# Altium PCB C2Sv1.PcbDoc (part 1 of 2)
Units mm, origin at the board's own origin, x right, y up, seen from the top; angles counter-clockwise.
Board outline 52 x 53 mm, 4 copper layers (Signal 1, GND, Power, Signal 2), stack 1.57 mm thick; 81 components, 85 nets, 351 pads, 170 vias.
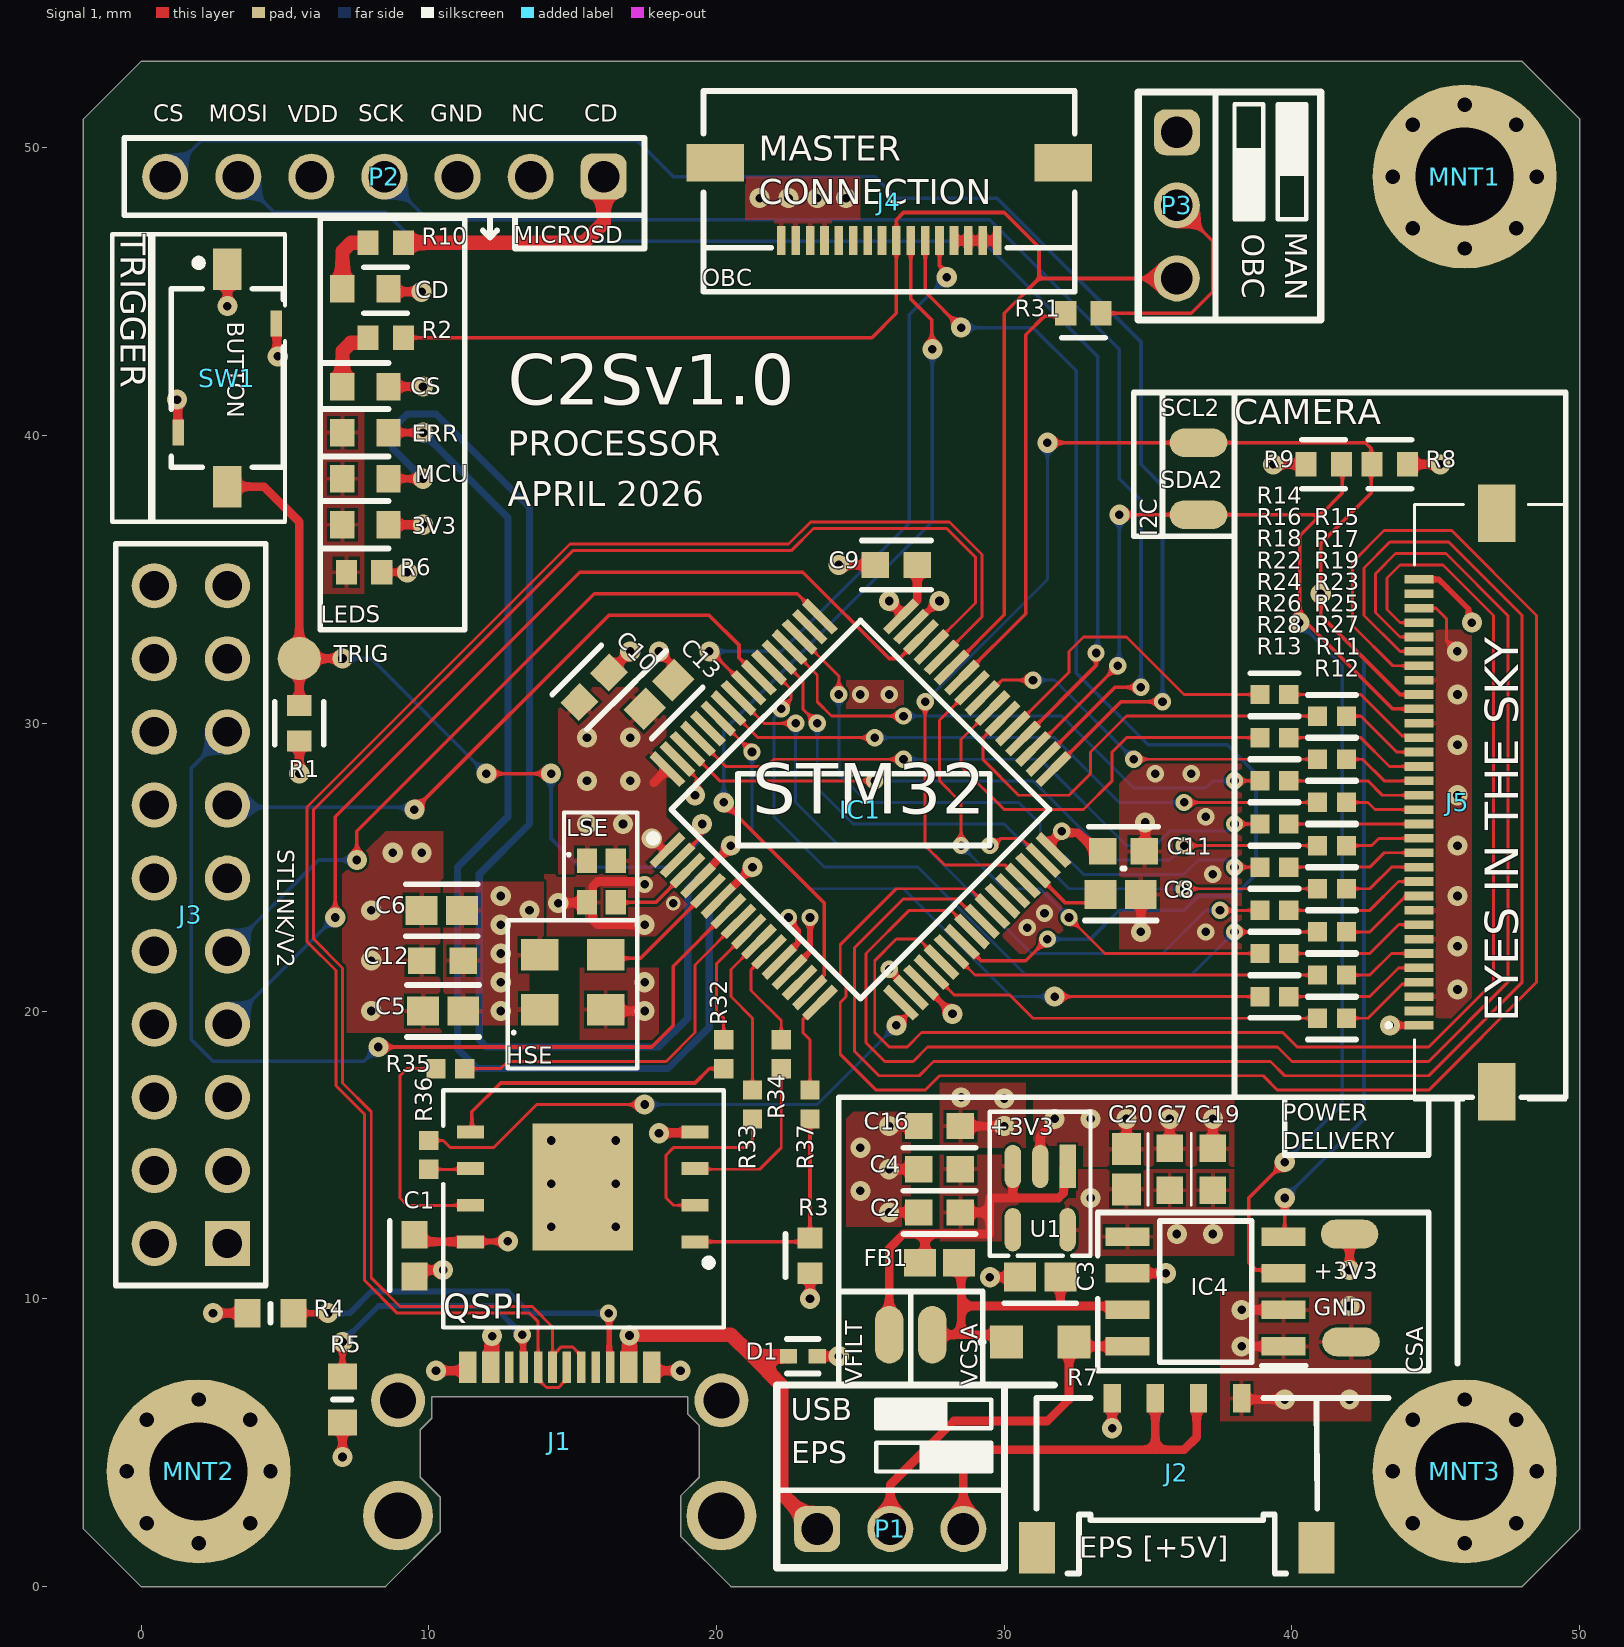
[diagram p0: Signal 1 view]
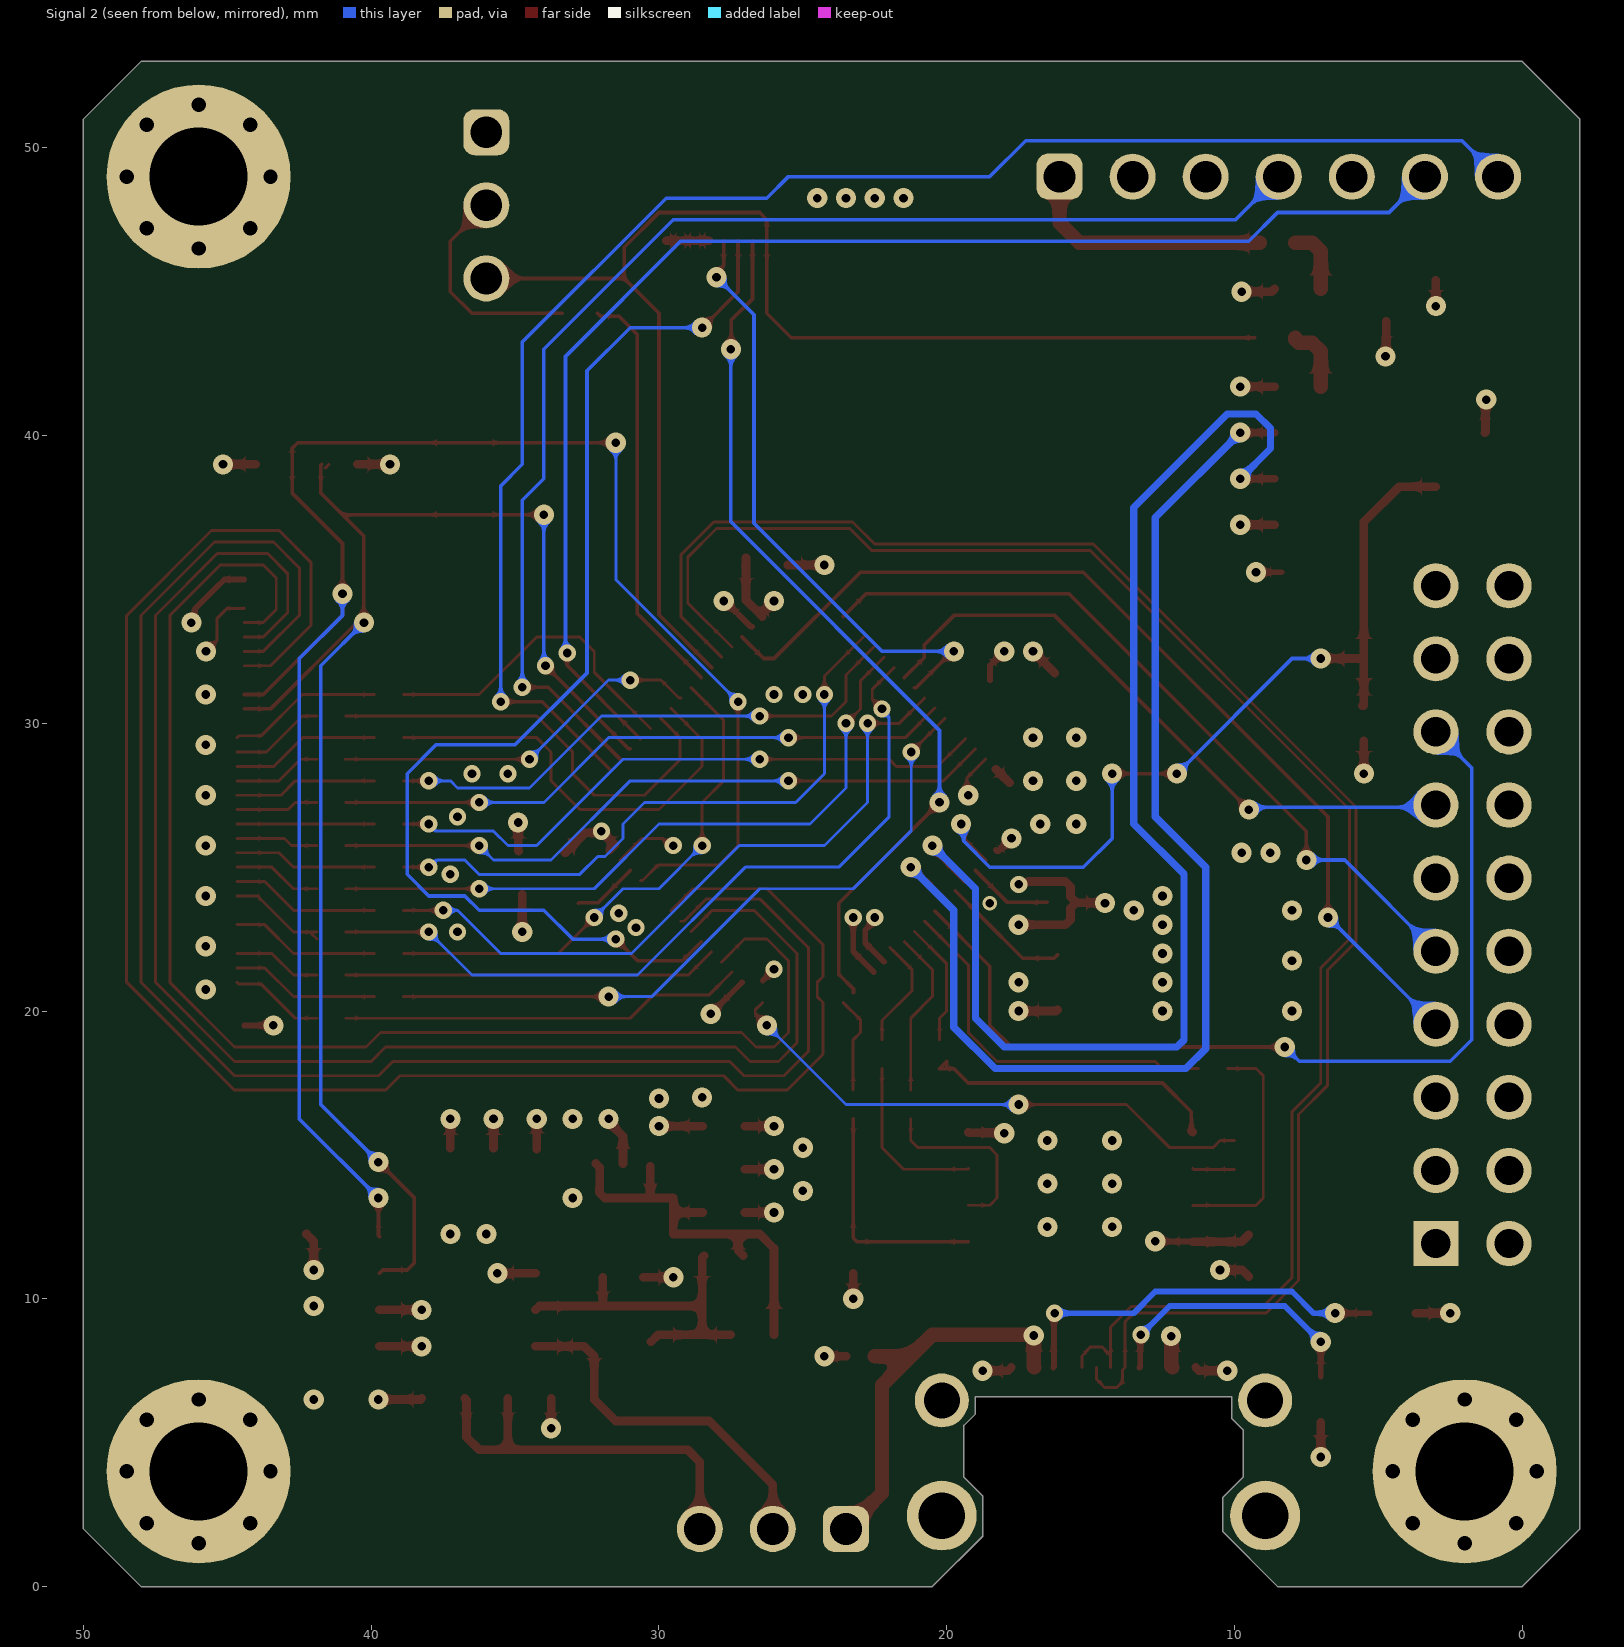
[diagram p1: Signal 2 view, seen from below]
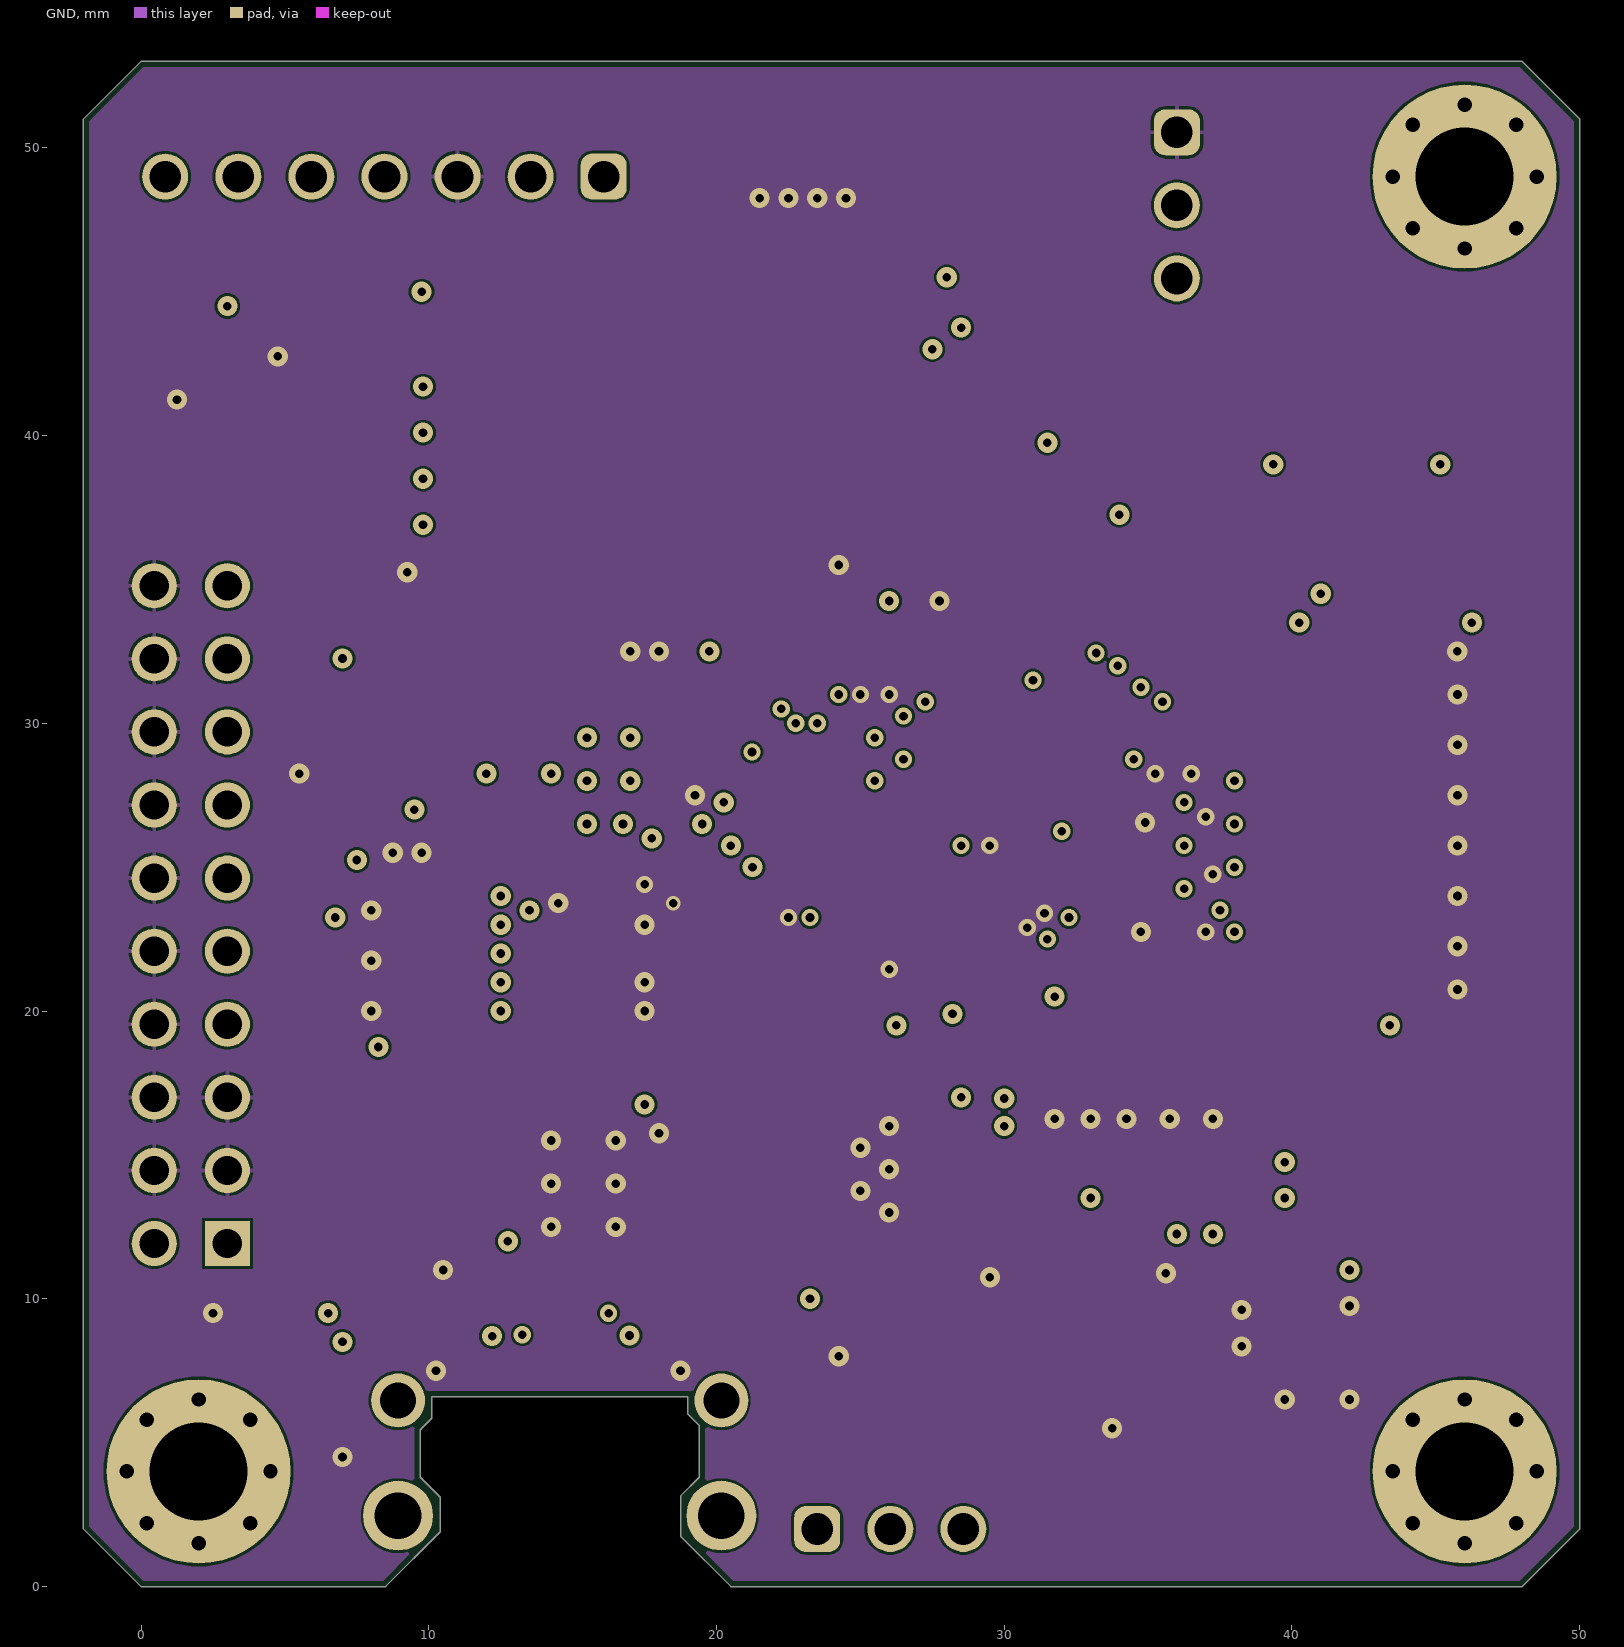
[diagram p2: GND]
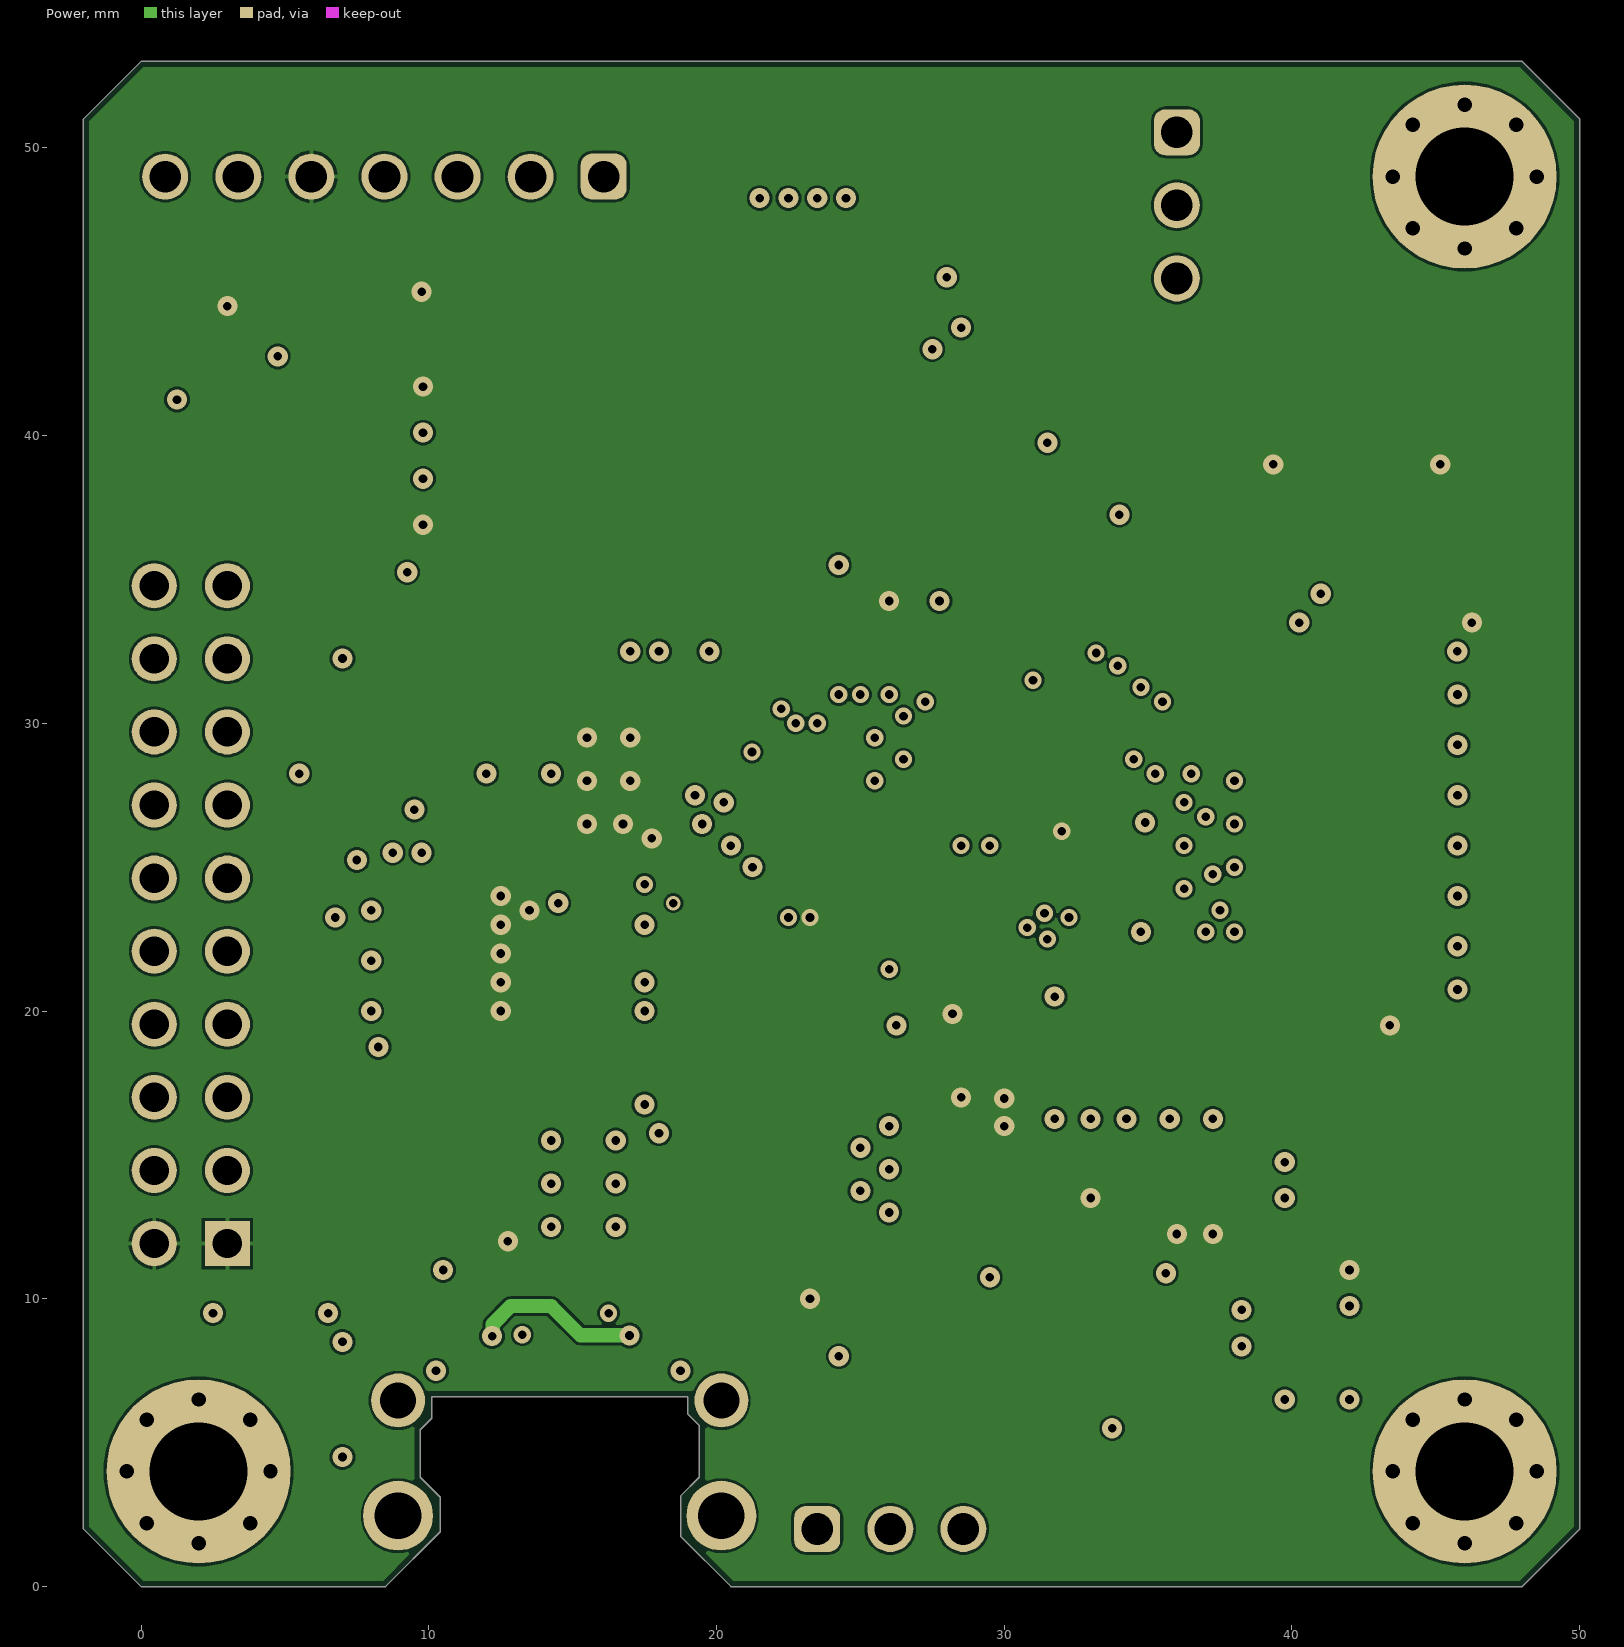
[diagram p3: Power]
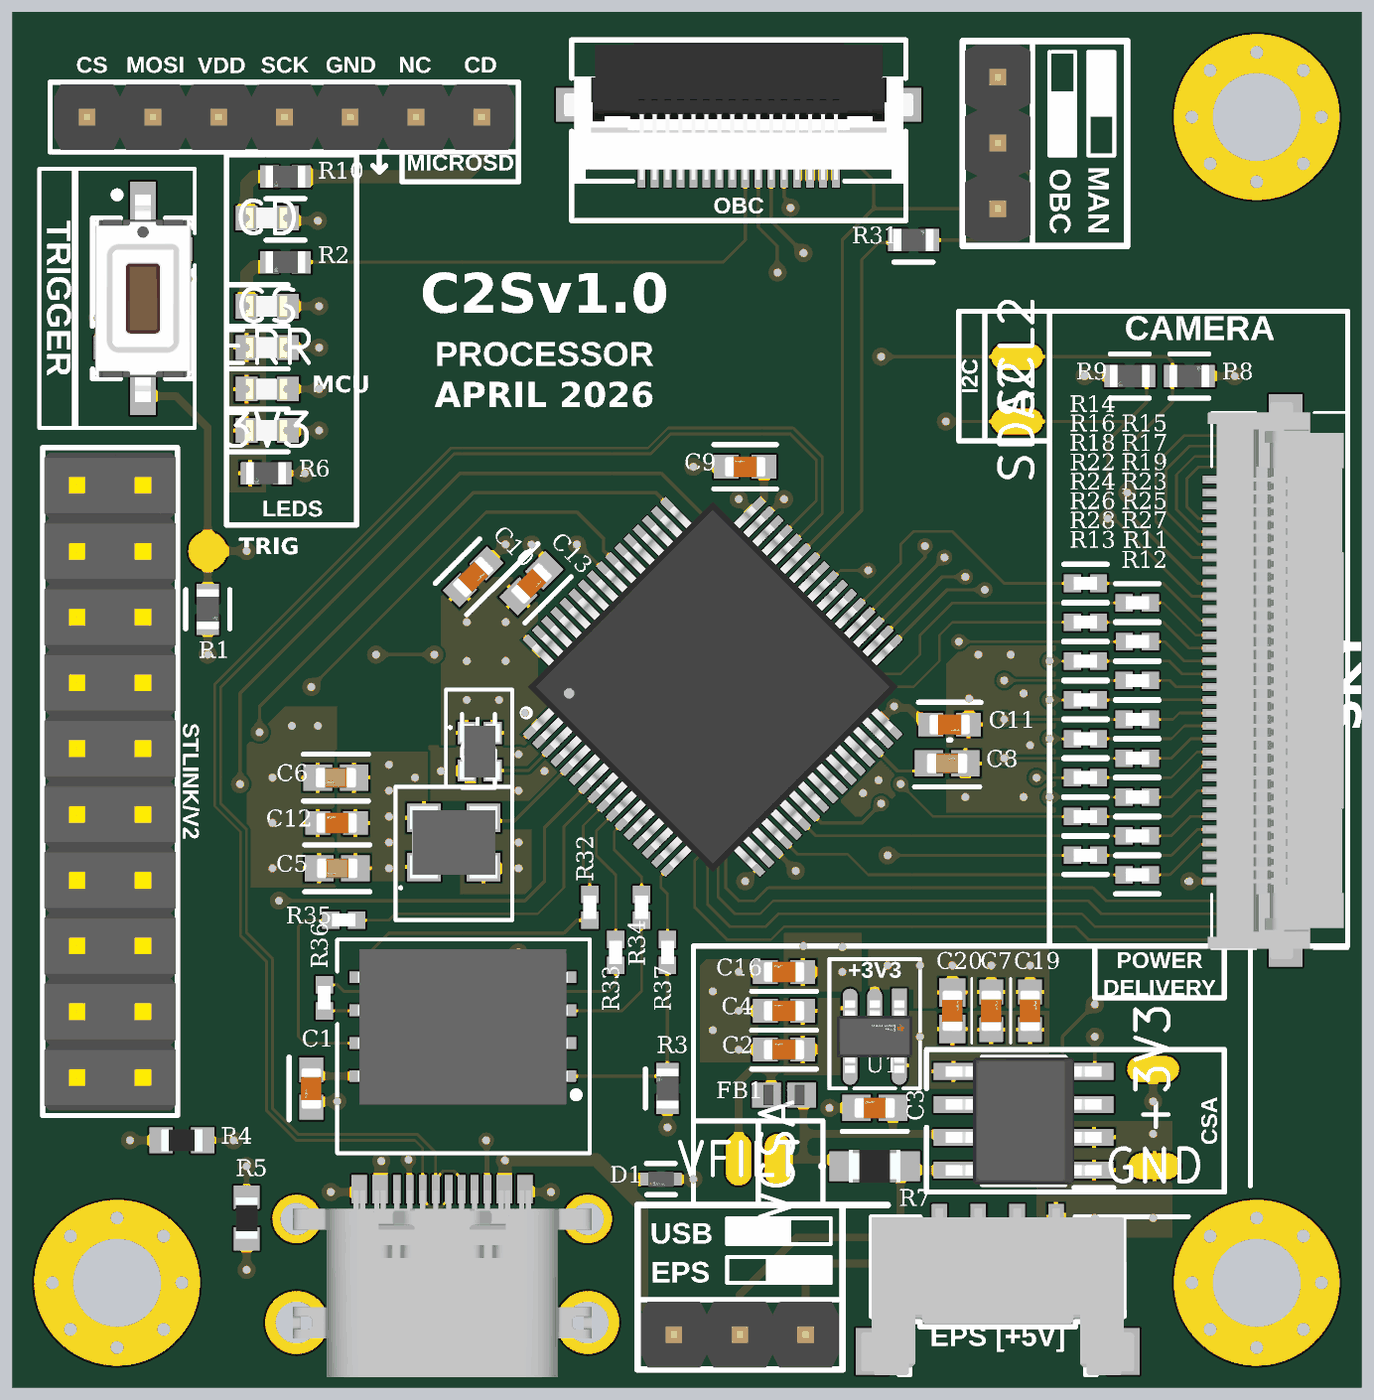
[diagram p4: 3D render of the assembled board from above, using the file's embedded part models]

## Layer stack, top to bottom
Top Solder: solder mask 0.0127, Solder Resist, Dk 3.8
Signal 1: signal copper 0.035
Dielectric 1: prepreg 0.1, 2313, Dk 4.05
GND: signal copper 0.0175
Core: core 1.265, FR-4, Dk 4.5
Power: signal copper 0.0175
Dielectric 2: prepreg 0.1, 2313, Dk 4.05
Signal 2: signal copper 0.035
Bottom Solder: solder mask 0.0127, Solder Resist, Dk 3.8

## Board outline
-2,2 0,0 8.5,0 10.4,1.9 10.4,3.1 9.7,3.8 9.7,5.45 10.1,5.85 10.1,6.6 19,6.6 19,6 19.4,5.6 19.4,3.8 18.75,3.15 18.75,1.75 20.5,0 48,0 50,2 50,51 48,53 0,53 -2,51

## Design rules (kind name [scope] priority, off if disabled: settings)
BoardOutlineClearance [All] p1: gap=0.2 ignorepadtopadclearanceinfootprint=FALSE
Clearance [All] p1: gap=0.089 ignorepadtopadclearanceinfootprint=FALSE except(0.1: SMDPad-Hole THPad-Hole Fill-Hole Poly-Hole Region-Hole; 0.2: Arc-Hole Track-Hole Via-Hole; 0.25: Text-Hole)
ComponentClearance [All] p1: gap=0.102 collisioncheckmode=3 verticalgap=0.102 showdistances=TRUE
DiffPairsRouting [All] p1: maxlimit=0.127 minlimit=0.127 mostfreqgap=0.127 toplayer_minwidth=0.102 toplayer_maxwidth=0.102 toplayer_prefwidth=0.102 midlayer1_minwidth=0.107 midlayer1_maxwidth=0.107 midlayer1_prefwidth=0.107 midlayer2_minwidth=0.107 midlayer2_maxwidth=0.107 midlayer2_prefwidth=0.107 bottomlayer_minwidth=0.149 bottomlayer_maxwidth=0.149 bottomlayer_prefwidth=0.149 impedanceprofiledriven=TRUE impedanceprofileid={D8ADF94D-BC98-40DC-B78C-3431A2F245A2} impedanceprofilevalue=90.000000 maxuncoupledlength=12.7
Height [All] p1: minheight=0 maxheight=1816.048 prefheight=12.7
HoleSize [All] p1: absolutevalues=TRUE maxlimit=6.3 minlimit=0.2 maxpercent=80.000 minpercent=20.000
HoleToHoleClearance [All] p1: gap=0.25 allowstackedmicrovias=FALSE
MinimumAnnularRing [All] p1: minimumring=0.074
MinimumSolderMaskSliver [All] p1: minsoldermaskwidth=0
PlaneClearance [All] p1: clearance=0.102
PlaneConnect PlaneConnectPowerPads [InPadClass('PowerPads')] p1: planeconnectstyle=Direct reliefexpansion=0.508 reliefentries=4 reliefconductorwidth=0.254 reliefairgap=0.254
PlaneConnect [All] p2: pad.planeconnectstyle=Relief pad.reliefexpansion=0.3 pad.reliefentries=4 pad.reliefconductorwidth=0.102 pad.reliefairgap=0.102 via.planeconnectstyle=Direct via.reliefexpansion=0.3 via.reliefentries=4 via.reliefconductorwidth=0.127 via.reliefairgap=0.127
PolygonConnect PolygonConnectPowerPads [All vs (InPadClass('PowerPads'))] p1: connectstyle=Direct reliefconductorwidth=0.254 reliefentries=4 polygonreliefangle="90 Angle" airgapwidth=0.254
PolygonConnect [All] p2: thpad.connectstyle=Relief thpad.reliefconductorwidth=0.152 thpad.reliefentries=4 thpad.polygonreliefangle="90 Angle" thpad.airgapwidth=0.102 smdpad.connectstyle=Relief smdpad.reliefconductorwidth=0.152 smdpad.reliefentries=4 smdpad.polygonreliefangle="90 Angle" smdpad.airgapwidth=0.102 via.connectstyle=Direct via.reliefconductorwidth=0.127 via.reliefentries=4 via.polygonreliefangle="90 Angle" via.airgapwidth=0.127
RoutingVias [All] p1: holewidth=0.2 width=0.45 viastyle="Through Hole" minholewidth=0.2 minwidth=0.45 maxholewidth=6.3 maxwidth=6.55
SignalTopValue [All] p1: minimum=3.300
SilkToSilkClearance [All] p1: silktosilkclearance=0
SilkToSolderMaskClearance [IsPad] p1: minsilkscreentomaskgap=0.102 clearancetoexposedcopper=TRUE
SolderMaskExpansion Via_SME [IsVia] p1: expansion=0.102 istentingtop=TRUE
SolderMaskExpansion [All] p2: expansion=0.08 istentingtop=FALSE
SupplyNets "Schematic Supply Nets_4" [InNet('VSEL')] p1: voltage=0.000
SupplyNets "Schematic Supply Nets_3" [InNet('VCSA')] p2: voltage=0.000
SupplyNets "Schematic Supply Nets_1" [InNet('VFILT')] p3: voltage=0.000
SupplyNets "Schematic Supply Nets_2" [InNet('+VCAP')] p4: voltage=0.000
SupplyNets "Schematic Supply Nets_7" [InNet('+VUSB')] p5: voltage=0.000
SupplyNets "Schematic Supply Nets_6" [InNet('+VEPS')] p6: voltage=0.000
SupplyNets "Schematic Supply Nets_5" [InNet('+3V3')] p7: voltage=0.000
SupplyNets "Schematic Supply Nets" [InNet('GND')] p8: voltage=0.000
Width [All] p1: maxlimit=1816.048 minlimit=0.102 preferedwidth=0.102
20 further rules are at their usual default settings.

## Classes and differential pairs
component class U_Power: C2 C3 C4 C7 C19 C20 D1 FB1 IC4 J1 J2 P1 R4 R5 R7 U1
component class U_Memory: C1 QSPI R3
component class U_MCU: 3V3 +3V3 C5 C6 C8 C9 C10 C11 C12 C13 C16 CS ERR GND HSE IC1 LSE LSE. MCU R1 R2 R6 SCL2 SDA2 SW1 TRIG VCSA VFILT
component class U_Connectors: CD J3 J4 J5 P2 P3 R10
component class TopLevel: MNT1 MNT2 MNT3 R8 R9 R11 R12 R13 R14 R15 R16 R17 R18 R19 R22 R23 R24 R25 R26 R27 R28 R31 R32 R33 R34 R35 R36 R37
differential pair USB_D: +USB_D_P -USB_D_N

## Components (designator, comment, footprint, x,y, rotation, side; value= is the part's Value field where it differs from the comment)
3V3 "HSMG-C190" LEDC1608X90N 7.8,36.9 r0 top
+3V3 "TP" TP06R#1 42,12.25 r90 top
C1 "GCM188L81H104MA57D" FP-GCM188-0_1-IPC_B 9.5,11.5 r270 top value=100nF
C2 "GCM188L81H104MA57D" FP-GCM188-0_1-IPC_B 27.75,13 r180 top value=100nF
C3 "GCM188D70J106ME36D" FP-GCM188-0_2-IPC_B 31.25,10.75 r180 top value=10µF
C4 "GCM188R71C105KA64J" FP-GCM188-0_1-IPC_B 27.75,14.5 r180 top value=1µF
C5 "GRT188C81E475KE13J" FP-GRT188-0_2-IPC_B 10.5,20 r180 top value=4.7µF
C6 "GRT188C81E475KE13J" FP-GRT188-0_2-IPC_B 10.451,23.5 r180 top value=4.7µF
C7 "GCM188R71C105KA64J" FP-GCM188-0_1-IPC_B 35.75,14.5 r90 top value=1µF
C8 "GRT188C81E475KE13J" FP-GRT188-0_2-IPC_B 34.046,24.051 r0 top value=4.7µF
C9 "GCM188L81H104MA57D" FP-GCM188-0_1-IPC_B 26.25,35.5 r180 top value=100nF
C10 "GCM188L81H104MA57D" FP-GCM188-0_1-IPC_B 15.75,31.25 r45 top value=100nF
C11 "GCM188L81H104MA57D" FP-GCM188-0_1-IPC_B 34.146,25.551 r0 top value=100nF
C12 "GCM188L81H104MA57D" FP-GCM188-0_1-IPC_B 10.477,21.75 r180 top value=100nF
C13 "GCM188D70J106ME36D" FP-GCM188-0_2-IPC_B 18,31 r45 top value=10µF
C16 "GCM188R71C105KA64J" FP-GCM188-0_1-IPC_B 27.75,16 r180 top value=1µF
C19 "GCM188L81H104MA57D" FP-GCM188-0_1-IPC_B 37.25,14.5 r90 top value=100nF
C20 "" FP-GCM188-0_2-IPC_B 34.25,14.5 r90 top value=10µF
CD "HSMG-C190" LEDC1608X90N 7.8,45.1 r0 top
CS "HSMG-C190" LEDC1608X90N 7.8,41.7 r0 top
D1 "TPD1E10B06DPYR" FP-DPY0002A-MFG 23,8 r0 top
ERR "HSMG-C190" LEDC1608X90N 7.8,40.1 r0 top
FB1 "120R" FP-BLM18-0_15-t0_6-d1_2-IPC_B 27.75,11.25 r180 top
GND "TP" TP06R#2 42.051,8.5 r0 top
HSE "ECS-TXO-3225MV-240-TR" ECSTXO3225MV240TR 15,21 r0 top
IC1 "STM32U575RIT3" QFP50P1200X1200X160-64N 25,27 r45 top locked
IC4 "INA219BIDR" SOIC127P600X175-8N 37,10.25 r180 top locked
J1 "USB C Connector" UJ20CHGMSMT2P16TR 14.551,5.265 r0 top locked
J2 "504050-0491" 5040500491 36,3.5 r180 top locked
J3 "TSW-110-08-G-D" FP-TSW-110-08-G-D-MFG 1.73,23.35 r90 top locked
J4 "505110-1692" FP-505110-1692-MFG 26.002,49.251 r180 top
J5 "505110-3291" 5051103291 46.887,27.25 r90 top locked
LSE "ECS-327TXO-2012-33-TR" ECS327TXO201233TR 16,24.5 r270 top
MCU "HSMG-C190" LEDC1608X90N 7.8,38.5 r0 top
MNT1 "M3 Mount" M3_Mount-Footprint-1 46,49 r0 top
MNT2 "M3 Mount" M3_Mount-Footprint-1 2,4 r0 top
MNT3 "M3 Mount" M3_Mount-Footprint-1 46,4 r0 top
P1 "61300311121" 61300311121 26.04,2 r0 top
P2 "61300711121" 61300711121 8.46,49 r180 top
P3 "61300311121" 61300311121 36,48 r270 top
QSPI "AT25SF2561C-MWUB-T" SON127P800X600X80-9N-D 15.35,13.885 r180 top
R1 "CRCW060310K0FKED" FP-CRCW0603-e3-IPC_C 5.5,30 r270 top value=10kΩ
R2 "CRCW0603470RFKEC" FP-CRCW0603-e3-IPC_C 8.5,43.4 r180 top value=470Ω
R3 "CRCW060310K0FKED" FP-CRCW0603-e3-IPC_C 23.25,11.5 r90 top value=10kΩ
R4 "5.1k" RESC1608X55N 4.5,9.5 r180 top
R5 "5.1k" RESC1608X55N 7,6.5 r270 top
R6 "CRCW0603470RFKEC" FP-CRCW0603-e3-IPC_C 7.75,35.25 r180 top value=470Ω
R7 "ERJ-6DQF1R6V" ERJ6_B_BW_R_LW_CW_D 31.25,8.5 r0 top
R8 "CRCW060310K0FKED" FP-CRCW0603-e3-IPC_C 43.4,39 r0 top value=10kΩ
R9 "CRCW060310K0FKED" FP-CRCW0603-e3-IPC_C 41.1,39 r180 top value=10kΩ
R10 "CRCW0603470RFKEC" FP-CRCW0603-e3-IPC_C 8.5,46.7 r180 top value=470Ω
R11 "CRCW040222R0JNED" FP-CRCW0402-e3-IPC_A 41.387,21.25 r0 top value=22Ω
R12 "CRCW040222R0JNED" FP-CRCW0402-e3-IPC_A 41.387,19.75 r0 top value=22Ω
R13 "CRCW040222R0JNED" FP-CRCW0402-e3-IPC_A 39.387,20.5 r0 top value=22Ω
R14 "CRCW040222R0JNED" FP-CRCW0402-e3-IPC_A 39.387,31 r0 top value=22Ω
R15 "CRCW040222R0JNED" FP-CRCW0402-e3-IPC_A 41.387,30.25 r0 top value=22Ω
R16 "CRCW040222R0JNED" FP-CRCW0402-e3-IPC_A 39.387,29.5 r0 top value=22Ω
R17 "CRCW040222R0JNED" FP-CRCW0402-e3-IPC_A 41.39,28.75 r0 top value=22Ω
R18 "CRCW040222R0JNED" FP-CRCW0402-e3-IPC_A 39.387,28 r0 top value=22Ω
R19 "CRCW040222R0JNED" FP-CRCW0402-e3-IPC_A 41.387,27.25 r0 top value=22Ω
R22 "CRCW040222R0JNED" FP-CRCW0402-e3-IPC_A 39.387,26.5 r0 top value=22Ω
R23 "CRCW040222R0JNED" FP-CRCW0402-e3-IPC_A 41.387,25.75 r0 top value=22Ω
R24 "CRCW040222R0JNED" FP-CRCW0402-e3-IPC_A 39.387,25 r0 top value=22Ω
R25 "CRCW040222R0JNED" FP-CRCW0402-e3-IPC_A 41.387,24.25 r0 top value=22Ω
R26 "CRCW040222R0JNED" FP-CRCW0402-e3-IPC_A 39.387,23.5 r0 top value=22Ω
R27 "CRCW040222R0JNED" FP-CRCW0402-e3-IPC_A 41.387,22.75 r0 top value=22Ω
R28 "CRCW040222R0JNED" FP-CRCW0402-e3-IPC_A 39.387,22 r0 top value=22Ω
R31 "CRCW060310K0FKED" FP-CRCW0603-e3-IPC_C 32.75,44.25 r0 top value=10kΩ
R32 "CRCW040222R0JNED" FP-CRCW0402-e3-IPC_A 20.25,18.5 r90 top value=22Ω
R33 "CRCW040222R0JNED" FP-CRCW0402-e3-IPC_A 21.25,16.75 r90 top value=22Ω
R34 "CRCW040222R0JNED" FP-CRCW0402-e3-IPC_A 22.25,18.5 r90 top value=22Ω
R35 "CRCW040222R0JNED" FP-CRCW0402-e3-IPC_A 10.75,18 r0 top value=22Ω
R36 "CRCW040222R0JNED" FP-CRCW0402-e3-IPC_A 10,15 r90 top value=22Ω
R37 "CRCW040222R0JNED" FP-CRCW0402-e3-IPC_A 23.25,16.75 r90 top value=22Ω
SCL2 "TP" TP06R#1 36.75,39.75 r90 top
SDA2 "TP" TP06R#1 36.75,37.25 r90 top
SW1 "PTS636" FP-PTS636_SKG25_SMTR_LFS-MFG 3,42 r270 top locked
TRIG "TP" TP06R#3 5.5,32.25 r0 top
U1 "TPS7A2033PDBVR" FP-DBV0005A-IPC_B 31.25,13.5 r270 top
VCSA "TP" TP06R#2 27.5,8.75 r270 top
VFILT "TP" TP06R#1 26,8.75 r180 top

## Footprints (in the part's own frame and the unit in brackets; to place one, negate y for a bottom-side part, rotate by r counter-clockwise, add the part's x,y. Pads: shape width x height; smd on the part's side, far side on the other; paste and mask are expansions set on the pad)
5040500491 [mm]
  rect 0.6x1 smd: 1(2.25,-3.04) 2(0.75,-3.04) 3(-0.75,-3.04) 4(-2.25,-3.04)
  rect 1.25x1.8 smd: MP1(4.855,2.15) MP2(-4.855,2.15)
  silkscreen extent -4.87,-3.05 4.87,3.05, body extent -5.28,-3.37 5.28,3.07, height 2
5051103291 [mm]
  rect 0.3x1 smd mask+0.04: 1(-7.75,2.475) 2(-7.25,2.475) 3(-6.75,2.475) 4(-6.25,2.475) 5(-5.75,2.475) 6(-5.25,2.475) 7(-4.75,2.475) 8(-4.25,2.475) 9(-3.75,2.475) 10(-3.25,2.475) 11(-2.75,2.475) 12(-2.25,2.475) 13(-1.75,2.475) 14(-1.25,2.475) 15(-0.75,2.475) 16(-0.25,2.475) 17(0.25,2.475) 18(0.75,2.475) 19(1.25,2.475) 20(1.75,2.475) 21(2.25,2.475) 22(2.75,2.475) 23(3.25,2.475) 24(3.75,2.475) 25(4.25,2.475) 26(4.75,2.475) 27(5.25,2.475) 28(5.75,2.475) 29(6.25,2.475) 30(6.75,2.475) 31(7.25,2.475) 32(7.75,2.475)
  rect 2x1.3 smd: MP1(-10.05,-0.225) MP2(10.05,-0.225)
  silkscreen extent -10.35,-2.63 10.35,3.57, body extent -10.75,-2.47 10.75,2.83, height 1.9
61300311121 [mm] "Pin Header, pitch 2.54 mm, THT, Vertical, single row, 3p"
  rrect50% 1.6x1.6 hole 1.1: 1(-2.54,0)
  round 1.6 hole 1.1: 2(0,0) 3(2.54,0)
  silkscreen extent -3.96,-1.35 3.96,1.35, body extent -3.81,-1.27 3.81,1.27, height 8.57
61300711121 [mm] "Pin Header, pitch 2.54 mm, THT, Vertical, single row, 7p"
  rrect50% 1.6x1.6 hole 1.1: 1(-7.62,0)
  round 1.6 hole 1.1: 2(-5.08,0) 3(-2.54,0) 4(0,0) 5(2.54,0) 6(5.08,0) 7(7.62,0)
  silkscreen extent -9.04,-1.35 9.04,1.35, body extent -8.89,-1.27 8.89,1.27, height 8.57
ECS327TXO201233TR [mm]
  rect 0.85x0.7 smd: 1(-0.725,-0.5) 2(0.725,-0.5) 3(0.725,0.5) 4(-0.725,0.5)
  silkscreen extent -0.98,-1.18 -0.88,-1.08, body extent -1.08,-0.78 1.08,0.78, height 1.3
ECSTXO3225MV240TR [mm]
  rect 1.3x1.1 smd: 1(-1.15,-0.95) 2(1.15,-0.95) 3(1.15,0.95) 4(-1.15,0.95)
  silkscreen extent -2.1,-1.8 -2,-1.7, body extent -1.69,-1.39 1.69,1.39, height 1.3
ERJ6_B_BW_R_LW_CW_D [mm] "Chip Resistor, 2-Leads, Body 2.03x1.27mm, IPC Low Density"
  rect 1.15x1.15 smd: 1(-1.175,0) 2(1.175,0)
  silkscreen extent -2.07,-0.05 -1.97,0.05, body extent -1,-0.63 1,0.63, height 0.6
FP-505110-1692-MFG [mm]
  rect 0.3x1 smd paste+0 mask+0.04: 1(-3.75,2.475) 2(-3.25,2.475) 3(-2.75,2.475) 4(-2.25,2.475) 5(-1.75,2.475) 6(-1.25,2.475) 7(-0.75,2.475) 8(-0.25,2.475) 9(0.25,2.475) 10(0.75,2.475) 11(1.25,2.475) 12(1.75,2.475) 13(2.25,2.475) 14(2.75,2.475) 15(3.25,2.475) 16(3.75,2.475)
  rect 2x1.3 smd paste+0: 17(-6.05,-0.225) 18(6.05,-0.225)
  silkscreen extent -6.45,-2.73 6.45,2.73, body extent -7.15,-2.83 7.15,3.08, height 0.25
FP-BLM18-0_15-t0_6-d1_2-IPC_B [mm]
  rect 1.106x0.958 smd paste+0: 1(-0.676,0) 2(0.676,0)
  body extent -1.48,-0.73 1.48,0.73, height 0.25
FP-CRCW0402-e3-IPC_A [mm]
  rect 0.668x0.672 smd paste+0: 1(-0.502,0) 2(0.502,0)
  silkscreen extent -0.84,-0.74 0.84,0.74, body extent -1.04,-0.54 1.04,0.54, height 0.25
FP-CRCW0603-e3-IPC_C [mm]
  rect 0.735x0.862 smd paste+0: 1(-0.615,0) 2(0.615,0)
  silkscreen extent -0.75,-0.85 0.75,0.85, body extent -1.08,-0.58 1.08,0.58, height 0.25
FP-DBV0005A-IPC_B [mm]
  rect 1.505x0.572 smd paste+0: 1(-1.1,0.95)
  rrect100% 1.505x0.572 smd paste+0: 2(-1.1,0) 3(-1.1,-0.95) 4(1.1,-0.95) 5(1.1,0.95)
  body extent -2.1,-1.7 2.1,1.7, height 0.25
FP-DPY0002A-MFG [mm]
  rect 0.6x0.5 smd paste+0: 1(-0.5,0) 2(0.5,0)
  silkscreen extent -0.56,-0.6 0.55,0.6, body extent -0.9,-0.45 0.9,0.45, height 0.25
FP-GCM188-0_1-IPC_B [mm]
  rect 0.959x0.912 smd paste+0: 1(-0.727,0) 2(0.727,0)
  silkscreen extent -1.21,-0.86 1.21,-0.86, body extent -1.46,-0.71 1.46,0.71, height 0.25
FP-GCM188-0_2-IPC_B [mm]
  rect 1.105x1.006 smd paste+0: 1(-0.701,0) 2(0.701,0)
  silkscreen extent -1.25,0.9 1.25,0.9, body extent -1.5,-0.75 1.5,0.75, height 0.25
FP-GRT188-0_2-IPC_B [mm]
  rect 1.105x1.006 smd paste+0: 1(-0.701,0) 2(0.701,0)
  silkscreen extent -1.25,-0.9 1.25,0.9, body extent -1.5,-0.75 1.5,0.75, height 0.25
FP-PTS636_SKG25_SMTR_LFS-MFG [mm]
  rect 1.45x1 smd paste+0: 1(-3.775,0) 2(3.775,0)
  rect 0.9x0.4 smd paste+0: 3(-1.9,1.7) 4(1.9,-1.7)
  silkscreen extent -4.12,-1.95 3.1,1.95, body extent -4.6,-2.05 4.6,2.05, height 0.25
FP-TSW-110-08-G-D-MFG [mm]
  rect 1.57x1.57 hole 1.02 paste-2539.97: 1(-11.43,-1.27)
  round 1.57 hole 1.02 paste-2539.97: 2(-11.43,1.27) 3(-8.89,-1.27) 4(-8.89,1.27) 5(-6.35,-1.27) 6(-6.35,1.27) 7(-3.81,-1.27) 8(-3.81,1.27) 9(-1.27,-1.27) 10(-1.27,1.27) 11(1.27,-1.27) 12(1.27,1.27) 13(3.81,-1.27) 14(3.81,1.27) 15(6.35,-1.27) 16(6.35,1.27) 17(8.89,-1.27) 18(8.89,1.27) 19(11.43,-1.27) 20(11.43,1.27)
  silkscreen extent -12.89,-2.61 12.89,2.61, body extent -12.99,-2.71 12.99,2.71, height 0.25
LEDC1608X90N [mm]
  rect 0.85x0.95 smd: 1(-0.8,0) 2(0.8,0)
  silkscreen extent -1.58,-0.82 0.8,0.82, body extent -0.83,-0.4 0.77,0.4, height 0.8
M3_Mount-Footprint-1 [mm]
  round 0.8 hole 0.5: 1(-2.5,0) 1(-1.8,-1.8) 1(-1.8,1.8) 1(0,-2.5) 1(0,2.5) 1(1.8,-1.8) 1(1.8,1.8) 1(2.5,0)
  round 6.4 hole 3.4: 1(0,0)
QFP50P1200X1200X160-64N [mm]
  rect 1.475x0.3 smd mask+0.04: 1(-5.738,3.75) 2(-5.738,3.25) 3(-5.738,2.75) 4(-5.738,2.25) 5(-5.738,1.75) 6(-5.738,1.25) 7(-5.738,0.75) 8(-5.738,0.25) 9(-5.738,-0.25) 10(-5.738,-0.75) 11(-5.738,-1.25) 12(-5.738,-1.75) 13(-5.738,-2.25) 14(-5.738,-2.75) 15(-5.738,-3.25) 16(-5.738,-3.75) 33(5.738,-3.75) 35(5.738,-2.75) 37(5.738,-1.75) 38(5.738,-1.25) 39(5.738,-0.75) 40(5.738,-0.25) 41(5.738,0.25) 42(5.738,0.75) 43(5.738,1.25) 44(5.738,1.75) 45(5.738,2.25) 46(5.738,2.75) 47(5.738,3.25) 48(5.738,3.75)
  rect 0.3x1.475 smd mask+0.04: 17(-3.75,-5.738) 18(-3.25,-5.738) 19(-2.75,-5.738) 20(-2.25,-5.738) 21(-1.75,-5.738) 22(-1.25,-5.738) 23(-0.75,-5.738) 24(-0.25,-5.738) 25(0.25,-5.738) 26(0.75,-5.738) 27(1.25,-5.738) 28(1.75,-5.738) 29(2.25,-5.738) 30(2.75,-5.738) 31(3.25,-5.738) 32(3.75,-5.738) 49(3.75,5.738) 50(3.25,5.738) 51(2.75,5.738) 52(2.25,5.738) 53(1.75,5.738) 54(1.25,5.738) 55(0.75,5.738) 56(0.25,5.738) 57(-0.25,5.738) 58(-0.75,5.738) 59(-1.25,5.738) 60(-1.75,5.738) 61(-2.25,5.738) 62(-2.75,5.738) 63(-3.25,5.738) 64(-3.75,5.738)
  rect 1.475x0.3 smd: 34(5.738,-3.25) 36(5.738,-2.25)
  silkscreen extent -5.92,-4.65 4.65,4.65, body extent -6.01,-6.01 6.01,6.01, height 1.6
RESC1608X55N [mm]
  rect 0.9x1 smd: 1(-0.8,0) 2(0.8,0)
  silkscreen extent 0,-0.33 0,0.33, body extent -0.8,-0.43 0.8,0.43, height 0.55
SOIC127P600X175-8N [mm]
  rect 1.528x0.65 smd: 1(-2.711,1.905) 2(-2.711,0.635) 3(-2.711,-0.635) 4(-2.711,-1.905) 5(2.711,-1.905) 6(2.711,-0.635) 7(2.711,0.635) 8(2.711,1.905)
  silkscreen extent -3.47,-2.45 1.6,2.58, body extent -3.01,-2.45 3.01,2.45, height 1.63
SON127P800X600X80-9N-D [mm]
  rect 0.95x0.45 smd: 1(-3.9,1.905) 2(-3.9,0.635) 3(-3.9,-0.635) 4(-3.9,-1.905) 5(3.9,-1.905) 6(3.9,-0.635) 7(3.9,0.635) 8(3.9,1.905)
  rect 3.5x4.4 smd: 9(0,0)
  silkscreen extent -4.5,2.51 -4.25,2.75, body extent -4.05,-3 4.05,3, height 0.8
TP06R#1 [mm] "Testpoint, round, d=0.6mm"
  oval 1x2 smd paste-2539.97: 1(0,0)
TP06R#2 [mm] "Testpoint, round, d=0.6mm"
  oval 2x1 smd paste-2539.97: 1(0,0)
TP06R#3 [mm] "Testpoint, round, d=0.6mm"
  round 1.5 smd paste-2539.97: 1(0,0)
UJ20CHGMSMT2P16TR [mm]
  rect 0.6x1.1 smd: A1(-3.2,2.35) A4(-2.4,2.35) B1(3.2,2.35) B4(2.4,2.35)
  rect 0.3x1.1 smd: A5(-1.25,2.35) A6(-0.25,2.35) A7(0.25,2.35) A8(1.25,2.35) B5(1.75,2.35) B6(0.75,2.35) B7(-0.75,2.35) B8(-1.75,2.35)
  round 1.875 hole 1.25: MH1(-5.62,1.2) MH2(5.62,1.2)
  round 2.43 hole 1.62: MH3(-5.62,-2.8) MH4(5.62,-2.8)
  body extent -5.77,-4.91 5.77,2.29, height 2.2

## Part data
3V3 CD CS ERR MCU: library part CMP-062-000014-1, "LED", Manufacturer_Name="Avago Technologies", Mouser Part Number=630-HSMG-C190, Datasheet Link=https://docs.broadcom.com/docs/AV02-0551EN, Design Item ID=HSMG-C190, Height=0.9mm, Manufacturer_Part_Number=HSMG-C190, Mouser Price/Stock=https://www.mouser.co.uk/ProductDetail/Broadcom-Avago/HSMG-C190?qs=YDL0qNrpDT605sxOaps8VQ%3D%3D, Source=SamacSys.SchLib
+3V3 GND SCL2 SDA2 TRIG VCSA VFILT: library part CMP-00028-00007-4, "test point", Author="Raphael Ho", Pins=1
C1 C2 C9 C10 C11 C12 C19: library part CMP-001-00108-1, "Cap Ceramic 0.1uF 50V X8L 20% Pad SMD 0603 150C Automotive T/R", Case/Package=0603, Dielectric Material=Ceramic, Manufacturer Lifecycle Status="IN PRODUCTION", Max Operating Temperature=150°C, Min Operating Temperature=-55°C, Tolerance=20%, Voltage Rating=50V, Added By=Felix, Country of Origin=Philippines, Export Control Classification Number (ECCN) Code=EAR99, Harmonized Tariff Schedule (HTS) Code=8532.24.00.20, Height=800µm, Introduction Date=2013-11-20, Length=1.6mm, Lifecycle Status=Production, Material=Ceramic, Mounting Technology="Surface Mount", Number of Terminals=2, REACH SVHC=Yes, RoHS=Compliant, Thickness=800µm, Voltage Rating (DC)=50V, Width=800µm
C3 C13 C20: library part CMP-001-00109-1, "6.3V 10uF X7T ±20% 0603 Multilayer Ceramic Capacitors MLCC - SMD/SMT ROHS", Case/Package=0603, Dielectric Material=Ceramic, Manufacturer Lifecycle Status="IN PRODUCTION", Max Operating Temperature=125°C, Min Operating Temperature=-55°C, Tolerance=20%, Voltage Rating=6.3V, Added By=Felix, Export Control Classification Number (ECCN) Code=EAR99, Harmonized Tariff Schedule (HTS) Code=8532.24.00.20, Height=800µm, Introduction Date=2020-01-27, Length=1.6mm, Lifecycle Status=Production, Material=Ceramic, Mounting Technology="Surface Mount", Number of Terminals=2, REACH SVHC=Yes, RoHS=Compliant, Schedule B=8532240020, Thickness=800µm, Voltage Rating (DC)=6.3V, Width=800µm
C4 C7 C16: library part CMP-001-00107-1, "16V 1uF X7R ±10% 0603 Multilayer Ceramic Capacitors MLCC - SMD/SMT ROHS", Case Code (Imperial)=0603, Case Code (Metric)=1608, Dielectric=X7R, Dielectric Material=Ceramic, Manufacturer Lifecycle Status="IN PRODUCTION", Max Operating Temperature=125°C, Min Operating Temperature=-55°C, Ratings=AEC-Q200, Tolerance=10%, Voltage Rating=16V, Added By=Felix, Case/Package=0603, Country of Origin=Philippines, Depth=800µm, Export Control Classification Number (ECCN) Code=EAR99, Harmonized Tariff Schedule (HTS) Code=8532.24.00.20, Height=800µm, Introduction Date=2010-10-29, Lead Free="Lead Free", Length=1.6mm, Lifecycle Status=Production, Material=Ceramic, Mounting Technology="Surface Mount", Number of Terminals=2, Packaging="Tape & Reel (TR)", Radiation Hardening=No, REACH SVHC=Yes, RoHS=Compliant, Schedule B="8532240020, 8532240020", Voltage Rating (DC)=16V, Width=800µm
C5 C6 C8: library part CMP-001-00100-1, "Ceramic Capacitor, Multilayer, Ceramic, 25V, 10% +Tol, 10% -Tol, X6S, 22% TC, 4.7uF, Surface Mount, 1608M/0603", Case/Package=0603, Dielectric Material=Ceramic, Manufacturer Lifecycle Status="IN PRODUCTION", Max Operating Temperature=105°C, Min Operating Temperature=-55°C, Tolerance=10%, Voltage Rating=25V, Added By=Felix, Export Control Classification Number (ECCN) Code=EAR99, Harmonized Tariff Schedule (HTS) Code=8532.24.00.20, Height=800µm, Introduction Date=2016-01-27, Length=1.6mm, Lifecycle Status=Production, Material=Ceramic, Mounting Technology="Surface Mount", Number of Terminals=2, REACH SVHC=Yes, RoHS=Compliant, Thickness=800µm, Voltage Rating (DC)=25V, Width=800µm
D1: library part CMP-0326-00004-4, "TVS DIODE 5.5V 14V 2X1SON", Breakdown Voltage=6V, Capacitance=12pF, Case/Package=0402, Clamping Voltage=14V, Leakage Current=100nA, Max Operating Temperature=125°C, Min Operating Temperature=-40°C, Package Quantity=1, Peak Pulse Current=5A, Peak Pulse Power=90W, Power Line Protection=No, Reverse Standoff Voltage=5.5V, Test Current=1mA, Composition=Zener, Contact Plating=Gold, Direction=Bidirectional, Element Configuration=Single, ESD Protection=Yes, Height=0.35mm, Interface=GPIO, Lead Free="Lead Free", Length=1.1mm, Max Reverse Leakage Current=100nA, Min Breakdown Voltage=6V, Number of Bidirectional Channels=1, Number of Channels=1, Number of Pins=2, Packaging="Tape and Reel", Radiation Hardening=No, REACH SVHC="No SVHC", Width=0.7mm, Working Voltage=5.5V
FB1: library part CMP-06046-002016-1, "Chip Ferrite Bead Array, 0603, 120Ω @ 100MHz, 25%, 0.03Ω, 3A", Case Code (Imperial)=0603, Case Code (Metric)=1608, DC Resistance (DCR)=30mR, Max Current Rating=3A, Max Operating Temperature=125°C, Min Operating Temperature=-55°C, Ratings=AEC-Q200, Case/Package=0603, Mount="Surface Mount", Number of Lines=1, Packaging="Tape and Reel", RoHS Compliant=Yes
HSE: library part CMP-179-000000-2, "Crystal or Oscillator", Manufacturer_Name=ECS, Mouser Part Number=520-TXO-3225MV-240-T, Datasheet Link=https://eu.mouser.com/datasheet/2/122/ECS-TXO-3225MV-1634330.pdf, Design Item ID=ECS-TXO-3225MV-240-TR, Height=1.2mm, Imported By=Felix, Manufacturer_Part_Number=ECS-TXO-3225MV-240-TR, Mouser Price/Stock=https://www.mouser.co.uk/ProductDetail/ECS/ECS-TXO-3225MV-240-TR?qs=d0WKAl%252BL4KYXn7UuwSFJGQ%3D%3D, Source=C2Sv0.1.SchLib
IC1: library part CMP-209-000002-2, "Ultra-low-power Arm Cortex-M33 32-bit MCU+TrustZone+FPU", Manufacturer_Name=STMicroelectronics, Added By="Felix Abbott", Datasheet Link=https://www.st.com/resource/en/datasheet/stm32u575ag.pdf, Design Item ID=STM32U575RIT3, Height=1.6mm, Manufacturer_Part_Number=STM32U575RIT3, Source=Schlib1.SchLib
IC4: library part CMP-033-000101-2, "Integrated Circuit", Manufacturer_Name="Texas Instruments", Mouser Part Number=595-INA219BIDR, Author="Damon Stewart", Datasheet Link=https://www.ti.com/lit/ds/symlink/ina219.pdf?HQS=TI-null-null-digikeymode-df-pf-null-wwe&ts=1601223553719, Design Item ID=INA219BIDR, Height=1.75mm, Manufacturer_Part_Number=INA219BIDR, Mouser Price/Stock=https://mou.sr/4bbpsfM
J1: library part CMP-026-000123-2, "UJ20-C-H-G-MSMT-2-P16-TR Connector", Manufacturer_Name="Same Sky", Manufacturer_Part_Number=UJ20-C-H-G-MSMT-2-P16-TR, Mouser Part Number=179-UJ20CHGMSMT2P16T, Author="Raphael Ho", Datasheet Link=https://cz.mouser.com/ProductDetail/Same-Sky/UJ20-C-H-G-MSMT-2-P16-TR?qs=IKkN%2F947nfBldcIwp9d6BA%3D%3D, Design Item ID=UJ20-C-H-G-MSMT-2-P16-TR, Height=3.36mm, Mouser Price/Stock=https://www.mouser.co.uk/ProductDetail/Same-Sky/UJ20-C-H-G-MSMT-2-P16-TR?qs=IKkN%2F947nfBldcIwp9d6BA%3D%3D, Source=SamacSys.SchLib
J2: library part CMP-026-000012-2, "Connector", Manufacturer_Name=Molex, Mouser Part Number=538-504050-0491, Datasheet Link=http://www.molex.com/pdm_docs/sd/5040500491_sd.pdf, Design Item ID=504050-0491, Height=2.15mm, Manufacturer_Part_Number=504050-0491, Mouser Price/Stock=https://www.mouser.co.uk/ProductDetail/Molex/504050-0491?qs=yXHQdf%252Bjwlut3yyE1%252ByhMA%3D%3D, Source=SamacSys.SchLib
J3: library part CMP-02766-000083-1, "CONN HEADER VERT 20POS 2.54MM", Manufacturer=Samtec, Temperature="-55°C to +125°C", Temperature Range High=+125°C, Temperature Range Low=-55°C, Automotive=No, Category=Conn, ComponentLink2Description=Datasheet, ComponentLink2URL=http://suddendocs.samtec.com/prints/tsw-xxx-xx-xxx-x-xx-xxx-mkt.pdf, Conn Gender=Male, Conn Orientation=Straight, Contact Material=Gold,Nickel, Device Class L1=Connectors, Device Class L2="Headers and Wire Housings", Device Class L3=unset, Digikey Description="CONN HEADER VERT 20POS 2.54MM", Footprint Url=http://suddendocs.samtec.com/prints/tsw-xxx-xx-x-x-xx-xxx-footprint.pdf, Height=8.71mm, Ipc Land Pattern Name=CAPAD1016W80L630D240, Lead Free=Yes, Manufacturer Part Number=TSW-110-08-G-D, Number Of Contacts=20, Number of Rows=2, Octopart=https://octopart.com/tsw-110-08-g-d-samtec-272555, Package=TSW-110-08-G-D, Pitch=2.54mm, RoHS=TRUE
J4: library part CMP-002-00119-1, "Conn FFC/FPC Connector SKT 16 POS 0.5mm Solder RA SMD Easy-On™ T/R"
J5: library part CMP-220-000001-1, "Easy-On FFC/FPC Connector", Manufacturer_Name=Molex, Mouser Part Number=538-505110-3291, Added By="Felix Abbott", Datasheet Link=https://www.molex.com/pdm_docs/sd/5051103291_sd.pdf, Design Item ID=505110-3291, Height=4.06mm, Manufacturer_Part_Number=505110-3291, Mouser Price/Stock=https://www.mouser.co.uk/ProductDetail/Molex/505110-3291?qs=0lSvoLzn4L9xGyl4KYdheA%3D%3D, Source=Schlib1.SchLib
LSE: library part CMP-190-000000-2, "Crystal or Oscillator", Manufacturer_Name=ECS, Mouser Part Number=520-327TXO-2012-33TR, Added By=Felix, Datasheet Link=https://ecsxtal.com/store/pdf/ECS-327TXO-2012.pdf, Design Item ID=ECS-327TXO-2012-33-TR, Height=1.2mm, Manufacturer_Part_Number=ECS-327TXO-2012-33-TR, Mouser Price/Stock=https://www.mouser.co.uk/ProductDetail/ECS/ECS-327TXO-2012-33-TR?qs=amGC7iS6iy%252Bnhf6zW2Y7hQ%3D%3D, Source="Schematic Library.SchLib"
MNT1 MNT2 MNT3: library part CMP-002-00124-2, "M3 mounting hole", Author="Raphael Ho"
P1 P3: library part CMP-096-000137-1, "WR-PHD Pin Header, THT, Vertical, pitch 2.54mm, 1 Row, 3P", Contact Resistance=20mOhm, Manufacturer="Wurth Elektronik", Operating Temperature Max=105°C, Operating Temperature Min=-40°C, Rated Current=3A, Withstanding Voltage=500V, Working Voltage=250V, Category="Board-to-Board Connectors", Component Type=Standard, ComponentLink1Description="Website Link", ComponentLink1URL=https://www.we-online.com/redexpert/article/61300311121?ad, ComponentLink2Description="Datasheet Link", ComponentLink2URL=https://www.we-online.com/redexpert/spec/61300311121?ad, Design Item ID=61300311121, Gender="Pin Header", Manufacturer Part Number=61300311121, Match Code=WR-PHD, Mount="Through Hole", Number of Pins=3, Number of Rows=1, Orientation=Vertical, Packaging=Bag, Pin Count=3, Pitch=2.54mm, Source=WR-PHD.SchLib
P2: library part CMP-096-000168-1, "WR-PHD Pin Header, THT, Vertical, pitch 2.54mm, 1 Row, 7P", Contact Resistance=20mOhm, Manufacturer="Wurth Elektronik", Operating Temperature Max=105°C, Operating Temperature Min=-40°C, Rated Current=3A, Withstanding Voltage=500V, Working Voltage=250V, Category="Board-to-Board Connectors", Component Type=Standard, ComponentLink1Description="Website Link", ComponentLink1URL=https://www.we-online.com/redexpert/article/61300711121?ad, ComponentLink2Description="Datasheet Link", ComponentLink2URL=https://www.we-online.com/redexpert/spec/61300711121?ad, Design Item ID=61300711121, Gender="Pin Header", Manufacturer Part Number=61300711121, Match Code=WR-PHD, Mount="Through Hole", Number of Pins=7, Number of Rows=1, Orientation=Vertical, Packaging=Bag, Pin Count=7, Pitch=2.54mm, Source=WR-PHD.SchLib
QSPI: library part CMP-181-000004-3, "Integrated Circuit", Manufacturer_Name="Renesas Electronics", Datasheet Link=https://www.renesas.com/us/en/products/memory-logic/non-volatile-memory/spi-nor-flash/at25sf2561c-256mbit-3v-spi-serial-flash-memory-single-dual-quad-io-qpi-and-dtr-support, Design Item ID=AT25SF2561C-MWUB-T, Height=0.8mm, Imported By=Felix, Manufacturer_Part_Number=AT25SF2561C-MWUB-T, Source=C2Sv0.1.SchLib
R1 R3 R8 R9 R31: library part CMP-009-00205-3, "Resistor", Case/Package=0603, Max Operating Temperature=155°C, Max Power Dissipation=100mW, Min Operating Temperature=-55°C, Temperature Coefficient=100ppm/°C, Tolerance=1%, Voltage Rating=75V, Added By=Felix, China RoHS=Non-Compliant, Composition="Thick Film", Country of Origin="Israel, Taiwan", Export Control Classification Number (ECCN) Code=EAR99, Features="Automotive AEC-Q200", Harmonized Tariff Schedule (HTS) Code=8533.21.00.30, Height=450µm, Introduction Date=2003-05-01, Lead Free="Lead Free", Length=1.55mm, Lifecycle Status=Production, Mounting Technology="Surface Mount", Number of Terminals=2, Number of Terminations=2, Packaging="Tape & Reel (TR)", Power Dissipation=100mW, Power Rating=100mW, REACH SVHC=Yes, RoHS=Compliant, Width=850µm, Working Voltage=75V
R2 R6 R10: library part CMP-009-00206-1, "Resistor", Case/Package=0603, Max Operating Temperature=155°C, Max Power Dissipation=100mW, Min Operating Temperature=-55°C, Temperature Coefficient=100ppm/°C, Tolerance=1%, Voltage Rating=75V, Added By=Felix, China RoHS=Non-Compliant, Composition="Thick Film", Country of Origin="Israel, Taiwan", Depth=850µm, Export Control Classification Number (ECCN) Code=EAR99, Features="Automotive AEC-Q200", Harmonized Tariff Schedule (HTS) Code=8533.21.00.30, Height=450µm, Introduction Date=2005-02-16, Lead Free="Lead Free", Length=1.55mm, Lifecycle Status=Production, Military Standard=Not, Mounting Technology="Surface Mount", Number of Terminals=2, Number of Terminations=2, Packaging="Tape & Reel (TR)", Power Dissipation=100mW, Power Rating=100mW, REACH SVHC=Yes, RoHS=Compliant, Width=850µm, Working Voltage=75V
R4 R5: library part CMP-057-000007-2, "AC0603FR-7W5K1L Resistor", Manufacturer_Name=YAGEO, Manufacturer_Part_Number=AC0603FR-7W5K1L, Author="Raphael Ho", Datasheet Link=https://www.yageo.com/upload/media/product/productsearch/datasheet/rchip/PYu-AC_51_RoHS_L_10.pdf, Design Item ID=AC0603FR-7W5K1L, Height=0.55mm
R7: library part CMP-238-000000-2, "SMD Current Sense Resistor", Manufacturer_Name=Panasonic, Mouser Part Number=667-ERJ-6DQF1R6V, Added By=Felix, Datasheet Link=http://industrial.panasonic.com/cdbs/www-data/pdf/RDN0000/AOA0000C313.pdf, Design Item ID=ERJ-6DQF1R6V, Manufacturer_Part_Number=ERJ-6DQF1R6V, Mouser Price/Stock=https://www.mouser.com/Search/Refine.aspx?Keyword=667-ERJ-6DQF1R6V, Source=Schlib1.SchLib
R11 R12 R13 R14 R15 R16 R17 R18 R19 R22 R23 R24 R25 R26 R27 R28 R32 R33 R34 R35 R36 R37: library part CMP-009-00208-3, "Resistor", Case Code (Imperial)=0402, Max Operating Temperature=155°C, Max Power Dissipation=63mW, Min Operating Temperature=-55°C, Ratings=AEC-Q200, Temperature Coefficient=200ppm/°C, Tolerance=5%, Voltage Rating=50V, Added By="Felix Abbott", Case/Package=0402, China RoHS=Non-Compliant, Composition="Thick Film", Contact Plating=Tin, Country of Origin="Israel, Taiwan", Depth=500µm, Export Control Classification Number (ECCN) Code=EAR99, Features="Automotive AEC-Q200", Harmonized Tariff Schedule (HTS) Code=8533.21.00.30, Height=350µm, Introduction Date=2005-03-24, Lead Free="Lead Free", Length=1mm, Lifecycle Status=Production, Military Standard=Not, Mounting Technology="Surface Mount", Number of Terminals=2, Number of Terminations=2, Packaging="Cut Tape", Pins=2, Power Rating=63mW, REACH SVHC=Yes, RoHS=Compliant, Schedule B="8533210045, 8533210045", Termination=SMD/SMT, Voltage Rating (DC)=50V, Weight=652.039032µg, Width=500µm, Working Voltage=50V
SW1: library part CMP-011-00018-1, "Tactile Switch", Color=White, Contact Current Rating=50mA, Contact Resistance=100mΩ, Insulation Resistance=100MΩ, Max Operating Temperature=90°C, Max Voltage Rating (DC)=12V, Min Operating Temperature=-40°C, Operating Force=2.94N, Added By="Felix A", Electrical Life=100kcycles, Height=1.9mm, Length=6.1mm, Life (Cycles)=100kcycles, Lifecycle Status=Production, Max Current Rating=50mA, Mounting Technology="Surface Mount", Mouser Link=https://au.mouser.com/c/electromechanical/switches/tactile-switches/?illuminated=Non-Illuminated&mounting%20direction=Straight&mounting%20style=SMD%2FSMT&series=PTS636&switch%20function=OFF%20-%20%28ON%29&termination%20style=SMD%2FSMT&instock=y, Number of Positions=1, REACH SVHC=Yes, RoHS=Compliant, Schedule B=8536509065, Sealable=IP40, Throw Configuration=SPST, Voltage Rating (DC)=12V
U1: library part CMP-019-00056-1, "300mA ultra-low-noise low-IQ low-dropout (LDO) linear regulator with high PSRR 5-SOT-23 -40 to 125", Case/Package=SOT-23, Dropout Voltage=145mV, Manufacturer Lifecycle Status=ACTIVE, Max Junction Temperature (Tj)=125°C, Max Supply Voltage=6V, Min Operating Temperature=-40°C, Min Supply Voltage=1.6V, Nominal Supply Current=6.5µA, Output Current=300mA, Output Voltage=3.3V, Accuracy=1.5%, Added By="Felix Abbott", Height=1.45mm, Length=2.9mm, Lifecycle Status=Production, Max Operating Temperature=125°C, Number of Channels=1, Number of Outputs=1, Pins=5, RoHS=Compliant, Thickness=1.2mm, Width=1.6mm

## Via types
v1: diameter 0.7, hole 0.3, Signal 1 to Signal 2, tented both sides, 125 vias
v2: diameter 0.6, hole 0.3, Signal 1 to Signal 2, tented both sides, 44 vias
v3: diameter 0.5, hole 0.3, Signal 1 to Signal 2, tented both sides, 1 vias

## Nets (pads, with @x,y where several pads share a name; then routed paths per layer and width w, separated by ;. In a path a pad name is that pad's centre, name@x,y a point inside that pad or via, vN(x,y) a via of type N, cw(c..) or ccw(c..) an arc to the next point about the centre after c; other vN are vias at no path point)
+3V3: 3V3.2 +3V3.1 C1.1 C5.1 C6.1 C7.1 C9.1 C10.1 C11.1 C12.1 C13.1 C16.1 C19.1 C20.1 CD.2 CS.2 HSE.1 HSE.4 IC1.1 IC1.13 IC1.19 IC1.32 IC1.48 IC1.64 IC4.5 J3.1 J3.2 J5.1 J5.32 LSE.1 LSE.4 P2.5 QSPI.8 R3.1 R8.2 R9.2 SW1.1 U1.5 | length 28.2
  Signal 1 w0.2: QSPI.8@11.5,11.973 11.517,11.99 12.74,11.99 v1(12.75,12) ; v1(17.75,26) 18.188,25.562 18.259,25.562 IC1.1 ; IC1.13 23.25,22.068 v2(23.25,23.25) ; IC1.19 27.113,20.993 28.2,19.905 v1(28.2,19.9) ; v1(43.4,19.5) J5.1 ; J5.32 45.104,35 45.385,34.718 46.135,33.968 46.135,33.615 v1(46.25,33.5)
  Signal 1 w0.3: v1(3,44.5) SW1.1@3,45.4 ; 3V3.2 v1(9.8,36.9) ; CS.2 v1(9.8,41.7) ; CD.2 8.7,45 v1(9.75,45) ; C1.1 9.747,11.98 QSPI.8 ; 17.818,27.932 IC1.64 ; v1(23.25,10) R3.1 ; v1(26,34.25) IC1.48@26.473,33.777 ; IC1.48 IC1.48@26.473,33.777 ; C9.1@26.977,35.75 C9.1 C9.1@26.977,35.477 ; C9.1@27,35.453 C9.1@26.977,35.477 ; C16.1 v1(30,16) ; IC1.32 31.527,25.777 v2(32,26.25) 32.057,26.193 32.557,26.193 33.25,25.5 C11.1@33.273,25.5 ; v1(39.35,39) R9.2 ; v1(42,11) 42,12 +3V3.1@42.25,12.25 ; R8.2 v1(45.15,39) ; IC1.48@26.473,33.777 26.977,34.28 C9.1@26.977,35.477
  other v1: 36,12.25 37.25,12.25 33,13.5 30,16.96 28.5,17 12.5,20 12.5,21 12.5,22 12.5,23 13.5,23.5 12.5,24 15.5,26.5 16.75,26.5 15.5,28 17,28 15.5,29.5 17,29.5
+VCAP: C8.1 IC1.30 | length 2.3
  Signal 1 w0.127: IC1.30 32.131,23.758 32.791,23.758 C8.1@32.799,23.75
+VEPS: J2.2 J2.3 P1.3 | length 14
  Signal 1 w0.3: P1.3 28.58,4.33 29,4.75 35.25,4.75 ; J2.2 35.25,4.75 ; J2.3 36.687,6.477 36.687,5.187 36.25,4.75 35.25,4.75
+VUSB: D1.1 J1.A4 J1.B4 P1.1 | length 20.9
  Signal 1 w0.5: J1.A4 12.193,7.656 12.193,8.693 v1(12.201,8.701) ; J1.B4 16.976,7.639 v1(16.976,8.726) 17,8.75 20.5,8.75 21.25,8 ; D1.1 21.25,8 ; P1.1 22.25,3.25 22.25,7 21.25,8
  Power w0.5: v1(12.201,8.701) 12.22,8.72 12.22,9.118 12.852,9.75 14.25,9.75 15.274,8.726 v1(16.976,8.726)
CD: P2.1 R10.1 | length 8.9
  Signal 1 w0.5: R10.1 15.387,46.7 16.08,47.393 P2.1
DCMI_D0: IC1.37 R14.1 | length 11.2
  Signal 1 w0.102: IC1.37 32.25,31.775 32.25,32.5 32.75,33 34.25,33 36.25,31 R14.1
DCMI_D1: IC1.38 R15.1 | length 15.4
  Signal 1 w0.102: IC1.38 29.268,29.5 29.268,28.732 30.5,27.5 32.25,27.5 33,28.25 33,29 34.25,30.25 R15.1
DCMI_D2: IC1.39 R16.1 | length 15.1
  Signal 1 w0.102: IC1.39 28.5,29.439 28.5,28.5 30,27 32.75,27 33.75,28 33.75,29 34.25,29.5 R16.1
DCMI_D3: IC1.40 R17.1 | length 13
  Signal 1 w0.102: IC1.40 29.307,30.881 29.927,31.5 v2(31,31.5) ; v2(34.5,28.75) R17.1
  Signal 2 w0.102: v2(31,31.5) 31.75,31.5 v2(34.5,28.75)
DCMI_D4: IC1.52 R18.1 | length 19
  Signal 1 w0.102: IC1.52 23.5,31.682 23.5,30.75 24,30.25 v2(26.5,30.25) ; v2(38,28) R18.1
  Signal 2 w0.102: v2(26.5,30.25) 32,30.25 34.5,27.75 37,27.75 37.25,28 v2(38,28)
DCMI_D5: IC1.58 R19.1 | length 21.8
  Signal 1 w0.102: IC1.58 21.439,29.5 v2(25.5,29.5) ; v2(36.25,27.25) R19.1
  Signal 2 w0.102: v2(25.5,29.5) 31.75,29.5 34,27.25 v2(36.25,27.25)
DCMI_D6: IC1.61 R22.1 | length 21.6
  Signal 1 w0.102: IC1.61 20.318,28.5 21.75,28.5 22,28.75 v2(26.5,28.75) ; v2(38,26.5) R22.1
  Signal 2 w0.102: v2(26.5,28.75) 31.25,28.75 34.25,25.75 35.25,25.75 35.75,26.25 37.75,26.25 v2(38,26.5)
DCMI_D7: IC1.62 R23.1 | length 23.7
  Signal 1 w0.102: IC1.62 20.111,28 v2(25.5,28) ; v2(36.25,25.75) R23.1
  Signal 2 w0.102: v2(25.5,28) 31,28 33.75,25.25 35.75,25.25 v2(36.25,25.75)
DCMI_D8: IC1.51 R24.1 | length 22
  Signal 1 w0.102: IC1.51 24.25,31.639 v2(24.25,31) ; v2(38,25) R24.1
  Signal 2 w0.102: v2(24.25,31) 24.25,28.25 25.25,27.25 30.5,27.25 31.25,26.5 31.25,26 31.875,25.375 32.125,25.375 32.75,24.75 36.25,24.75 36.75,25.25 37.716,25.25 37.966,25 v2(38,25)
DCMI_D9: IC1.53 R25.1 | length 23.9
  Signal 1 w0.102: IC1.53 23,31.475 23,30.5 v2(23.5,30) ; v2(36.25,24.25) R25.1
  Signal 2 w0.102: v2(23.5,30) 23.5,27.75 24.75,26.5 30,26.5 32.25,24.25 v2(36.25,24.25)
DCMI_D10: IC1.57 R26.1 | length 24
  Signal 1 w0.102: IC1.57 21.646,30 v2(22.75,30) ; v2(37.5,23.5) R26.1
  Signal 2 w0.102: v2(22.75,30) 22.75,27.25 24.25,25.75 27.207,25.75 30.957,22 35.5,22 37,23.5 v2(37.5,23.5)
DCMI_D11: IC1.54 R27.1 | length 27.5
  Signal 1 w0.102: IC1.54 22.588,31.18 22.588,30.838 v2(22.25,30.5) ; v2(38,22.75) R27.1
  Signal 2 w0.102: v2(22.25,30.5) 22.25,30.444 22,30.194 22,26.75 23.75,25 27,25 30.75,21.25 36.5,21.25 v2(38,22.75)
DCMI_GPIO0: IC1.21 J5.29 | length 48.3
  Signal 1 w0.102: IC1.21 27.025,22.5 26.25,22.5 25.5,21.75 25.5,19.25 26,18.75 26.629,18.75 27.129,19.25 39.682,19.25 40.182,18.75 44.75,18.75 47,21 47,33.75 45.25,35.5 43.75,35.5 43.3,35.05 43.3,33.95 43.75,33.5 J5.29
DCMI_GPIO1: IC1.24 J5.28 | length 53.6
  Signal 1 w0.102: IC1.24 28.146,23.5 26.7,23.5 25.2,22 25.2,18.9 25.85,18.25 26.836,18.25 27.336,18.75 39.5,18.75 40,18.25 44.75,18.25 47.5,21 47.5,33.75 45.35,35.9 43.6,35.9 42.9,35.2 42.9,33.85 43.75,33 J5.28
DCMI_GPIO2: IC1.25 J5.27 | length 58.1
  Signal 1 w0.102: IC1.25 29.131,23.119 28.35,23.9 26.5,23.9 24.8,22.2 24.8,18.6 25.65,17.75 27.043,17.75 27.543,18.25 39.25,18.25 39.75,17.75 44.75,17.75 48,21 48,33.75 45.45,36.3 43.4,36.3 42.5,35.4 42.5,33.75 43.75,32.5 J5.27
DCMI_GPIO3: IC1.26 J5.26 | length 63
  Signal 1 w0.102: IC1.26 28.811,24.25 26.25,24.25 24.3,22.3 24.3,21.2 24.5,21 24.5,20.5 24.3,20.3 24.3,18.5 25.55,17.25 27.25,17.25 27.75,17.75 39,17.75 39.5,17.25 44.75,17.25 48.5,21 48.5,33.75 45.55,36.7 43.2,36.7 42.1,35.6 42.1,33.4 43.5,32 J5.26
DCMI_HSYNC: IC1.20 R12.1 | length 14.1
  Signal 1 w0.102: IC1.20 28.267,20.551 30.199,20.551 31,19.75 R12.1
DCMI_MCLK: IC1.41 R28.1 | length 18.2
  Signal 1 w0.102: v2(28.5,25.75) 28.5,27.25 27.75,28 27.75,30.104 IC1.41 ; v2(32.25,23.25) 33.5,22 R28.1
  Signal 2 w0.102: v2(28.5,25.75) 30,24.25 31.25,24.25 v2(32.25,23.25)
DCMI_PIXCLK: IC1.22 R11.1 | length 13
  Signal 1 w0.102: IC1.22 28.982,21.25 R11.1
DCMI_VSYNC: IC1.59 R13.1 | length 24.4
  Signal 1 w0.102: IC1.59 v2(21.232,29) ; v1(31.75,20.5) R13.1
  Signal 2 w0.102: v2(21.232,29) 21.232,26.268 23.25,24.25 26.5,24.25 30.25,20.5 v1(31.75,20.5)
GND: C1.2 C2.2 C3.2 C4.2 C5.2 C6.2 C7.2 C8.2 C9.2 C10.2 C11.2 C12.2 C13.2 C16.2 C19.2 C20.2 D1.2 GND.1 HSE.2 IC1.12 IC1.18 IC1.31 IC1.47 IC1.63 IC4.1 IC4.2 IC4.6 J1.A1 J1.B1 J2.1 J2.4 J3.3 J3.4 J3.5 J3.6 J3.8 J3.10 J3.12 J3.14 J3.16 J3.18 J3.20 J4.13 J4.14 J4.15 J4.16 J5.3 J5.7 J5.9 J5.22 J5.25 J5.30 LSE.2 P2.3 P3.1 QSPI.4 QSPI.9 R1.2 R4.2 R5.2 R6.1 SW1.3 SW1.4 U1.2 | length 51.3
  Signal 1 w0.102: IC1.63 19.301,28.103 19.301,27.551 v1(19.25,27.5) ; v2(29.5,25.75) 29.635,25.75 29.885,26 30.596,26 IC1.31 ; J5.30 44.418,33.995 45.005,33.995 45.366,33.634 45.366,32.878 v1(45.744,32.5)
  Signal 1 w0.2: R6.1 v1(9.25,35.25) ; v1(18,32.5) 18.495,32.005 C13.2 ; IC1.12@22.18,21.71 22.831,22.361 22.831,22.811 22.5,23.142 v2(22.5,23.25) ; v2(26,21.452) IC1.18@26.394,21.057 ; IC1.47 26.807,33.355 27.702,34.25 v1(27.75,34.25)
  Signal 1 w0.3: v1(1.25,41.25) 1.275,41.225 1.275,40.125 SW1.4 ; v1(2.5,9.5) R4.2 ; SW1.3@4.725,43.975 4.725,42.775 v1(4.75,42.75) ; v1(5.5,28.25) R1.2 ; v1(7,4.5) R5.2 ; C1.2 9.727,11 v1(10.5,11) ; v1(10.25,7.5) 11.236,7.5 J1.A1 ; v1(14.5,23.75) 14.512,23.763 LSE.2@15.488,23.763 ; HSE.2 16.2,20 v1(17.5,20) ; C10.2@16.247,31.747 C10.2 v1(17,32.5) ; v1(17.5,23) 15.876,23 15.7,23.176 15.7,23.575 LSE.2 15.7,23.975 15.7,24.324 15.876,24.5 17.188,24.5 17.23,24.457 17.443,24.457 v2(17.5,24.4) ; J1.B1 17.866,7.5 v1(18.75,7.5) ; v1(18,15.75) 18.02,15.77 19.23,15.77 QSPI.4 ; D1.2 v1(24.25,8) ; v1(24.25,35.5) C9.2 ; v1(26,13) C2.2 ; v1(26,14.5) C4.2 ; v1(26,16) C16.2 ; v1(29.5,10.75) C3.2 ; U1.2@31.25,14.7 31.25,15.65 31.75,16.15 v1(31.75,16.25) ; v1(33.75,5.5) J2.1 ; C20.2 v1(34.25,16.25) ; IC4.6 v1(35.615,10.885) ; C8.2 34.75,24.048 v1(34.75,22.75) ; C11.2 34.896,25.574 v1(34.896,26.551) ; C7.2 v1(35.75,16.25) ; C19.2 v1(37.25,16.25) ; J2.4 38.29,6.5 v1(39.75,6.5) ; v1(38.25,8.345) IC4.1 ; v1(38.25,9.615) IC4.2
  other v1: 42,6.5 42,9.75 14.25,12.5 16.5,12.5 25,13.75 14.25,14 16.5,14 25,15.25 14.25,15.5 16.5,15.5 33,16.25 8,20 45.75,20.75 17.5,21 8,21.75 45.75,22.25 8,23.5 45.75,24 8.75,25.5 9.75,25.5 45.75,25.75 45.75,27.5 45.75,29.25 45.75,31 21.5,48.25 22.5,48.25 23.5,48.25 24.5,48.25
  other v2: 37,22.75 30.8,22.9 31.4,23.4 37.25,24.75 37,26.75 35.25,28.25 36.5,28.25 25,31 26,31
  other v3: 18.5,23.75
HSE: HSE.3 IC1.5 | length 4.6
  Signal 1 w0.127: HSE.3 16.266,21.834 17.359,21.834 18.775,23.25 IC1.5
I2C2_SCL: IC1.29 IC4.4 J5.24 R8.1 SCL2.1 | length 66.2
  Signal 1 w0.102: v2(27.25,30.75) 27.25,25.75 27.918,25.082 30.022,25.082 30.57,24.534 IC1.29
  Signal 1 w0.127: v1(31.5,39.75) SCL2.1 42.55,39.75 42.75,39.55 42.75,38 41,36.25 v1(41,34.5) 41,33.75 43.75,31 J5.24 ; IC4.4 39.75,12.194 v1(39.75,13.5)
  Signal 2 w0.102: v2(27.25,30.75) 31.5,35 v1(31.5,39.75)
  Signal 2 w0.127: v1(39.75,13.5) 42.5,16.25 42.5,32.25 41,33.75 v1(41,34.5)
I2C2_SDA: IC1.35 IC4.3 J5.23 R9.1 SDA2.1 | length 53.7
  Signal 1 w0.102: R9.1@41.465,39 R9.1@41.6,38.865
  Signal 1 w0.127: IC1.35 31.057,29.113 v2(33.945,32) ; v1(34,37.25) SDA2.1 41,37.25 ; IC4.3 39.596,11 38.75,11 38.5,11.25 38.5,13.5 v1(39.75,14.75) ; R9.1 41.75,38.965 41.75,38 41,37.25 ; J5.23 43.5,30.5 40.61,33.39 40.36,33.39 v1(40.25,33.5) 40.265,33.515 40.265,36.515 41,37.25
  Signal 2 w0.127: v2@34,32 v1(34,37.25) ; v1(39.75,14.75) 41.75,16.75 41.75,32 v1(40.25,33.5)
LED_ERR: ERR.2 IC1.6 | length 42
  Signal 1 w0.127: IC1.6 IC1.6@20.068,23.827 ; v1@21.241,25 v1(21.25,25)
  Signal 1 w0.254: ERR.2 v1(9.8,40.1) ; IC1.6@20.068,23.827 v1@21.241,25
  Signal 2 w0.254: v1(9.8,40.1) 12.75,37.15 12.75,26.75 11,25 11,18.689 11.689,18 18.311,18 19.75,19.439 19.75,23.5 v1(21.25,25)
LED_MCU: IC1.4 MCU.2 | length 45
  Signal 1 w0.127: IC1.4 IC1.4@19.352,24.568 ; v1@20.5,25.716 v1(20.5,25.75)
  Signal 1 w0.254: MCU.2 v1(9.8,38.5) ; IC1.4@19.352,24.568 v1@20.5,25.716
  Signal 2 w0.254: v1(9.8,38.5) 8.75,39.55 8.75,40.25 9.25,40.75 10.25,40.75 13.5,37.5 13.5,26.5 11.75,24.75 11.75,19 12,18.75 18,18.75 19,19.75 19,24.25 v1(20.5,25.75)
LSE: IC1.3 LSE.3 | length 3
  Signal 1 w0.127: LSE.3 17.886,23.775 IC1.3
Net3V3_1: 3V3.1 ERR.1 MCU.1 R6.2
NetCD_1: CD.1 R10.2 | length 2.3
  Signal 1 w0.5: CD.1 7,46.4 7.3,46.7 R10.2
NetCS_1: CS.1 R2.2 | length 2.3
  Signal 1 w0.5: CS.1 7,42.926 7.293,43.219 7.767,43.219 7.885,43.336 R2.2
NetJ1_A5: J1.A5 R5.1 | length 9.7
  Signal 1 w0.2: R5.1 v1(7,8.5) ; v2(13.25,8.75) 13.276,8.724 13.276,7.641 J1.A5
  Signal 2 w0.2: v1@7,8.338 v1(7,8.5) 8.25,9.75 12.25,9.75 v2(13.25,8.75)
NetJ1_B5: J1.B5 R4.1 | length 13.5
  Signal 1 w0.2: R4.1 v1(6.5,9.5) ; v2(16.25,9.5) 16.276,9.474 16.276,7.641 J1.B5
  Signal 2 w0.2: v1(6.5,9.5) 7.25,9.5 8,10.25 12.75,10.25 13.5,9.5 v2(16.25,9.5)
NetJ4_1: J4.1 J4.2 J4.3 J4.4 | length 1.5
  Signal 1 w0.3: J4.4 J4.3 J4.2 J4.1
NetJ5_4: J5.4 R12.2 | length 3.3
  Signal 1 w0.102: R12.2 42.637,19.75 43.82,20.932 44.595,20.932 J5.4@44.662,21
NetJ5_5: J5.5 R13.2 | length 5.2
  Signal 1 w0.102: R13.2 42.704,20.5 43.704,21.5 J5.5@44.662,21.5
NetJ5_6: J5.6 R11.2 | length 3.1
  Signal 1 w0.102: R11.2 42.704,21.25 43.454,22 J5.6 J5.6@44.662,22
NetJ5_8: J5.8 R28.2 | length 5.2
  Signal 1 w0.102: R28.2 42.704,22 43.704,23 J5.8 J5.8@44.662,23
NetJ5_10: J5.10 R27.2 | length 3.5
  Signal 1 w0.102: R27.2@41.89,22.5 R27.2@42.069,22.679 ; R27.2 41.894,22.745 42.383,22.745 42.387,22.75 42.704,22.75 43.954,24 J5.10 J5.10@44.662,24
NetJ5_11: J5.11 R26.2 | length 5.2
  Signal 1 w0.102: R26.2 42.704,23.5 43.704,24.5 J5.11 J5.11@44.662,24.5
NetJ5_12: J5.12 R25.2 | length 3.1
  Signal 1 w0.102: R25.2 42.704,24.25 43.454,25 J5.12 J5.12@44.662,25
NetJ5_13: J5.13 R24.2 | length 5
  Signal 1 w0.102: R24.2 42.704,25 43.204,25.5 J5.13 J5.13@44.662,25.5
NetJ5_14: J5.14 R23.2 | length 2.9
  Signal 1 w0.102: R23.2 42.768,25.75 43.018,26 J5.14 J5.14@44.662,26
NetJ5_15: J5.15 R22.2 | length 4.8
  Signal 1 w0.102: R22.2 42.637,26.5 J5.15 J5.15@44.662,26.5
NetJ5_16: J5.16 R19.2 | length 2.9
  Signal 1 w0.102: R19.2 42.637,27.25 42.887,27 J5.16 J5.16@44.662,27
NetJ5_17: J5.17 R18.2 | length 5
  Signal 1 w0.102: R18.2 42.637,28 43.138,27.5 J5.17 J5.17@44.662,27.5
NetJ5_18: J5.18 R17.2 | length 3.1
  Signal 1 w0.102: R17.2 42.454,28.75 43.204,28 J5.18 J5.18@44.662,28
NetJ5_19: J5.19 R16.2 | length 5.2
  Signal 1 w0.102: R16.2 42.389,29.5 43.389,28.5 J5.19 J5.19@44.662,28.5
NetJ5_20: J5.20 R15.2 | length 3.3
  Signal 1 w0.102: R15.2 42.387,30.25 43.638,29 J5.20 J5.20@44.662,29
NetJ5_21: J5.21 R14.2 | length 5.4
  Signal 1 w0.102: R14.2 42.387,31 43.82,29.568 44.595,29.568 J5.21@44.662,29.5
NetP3_2: P3.2 R31.2 | length 7.7
  Signal 1 w0.127: R31.2 36.5,44.25 37.25,45 37.25,46.75 P3.2
NetQSPI_1: QSPI.1 R3.2 R37.1 | length 8.2
  Signal 1 w0.127: QSPI.1 23.115,11.98 R3.2 R37.1
NetQSPI_2: QSPI.2 R33.1 | length 6.6
  Signal 1 w0.102: QSPI.2 18.5,13.25 18.25,13.5 18.25,15 18.5,15.25 21,15.25 21.25,15.5 R33.1
NetQSPI_3: QSPI.3 R34.1 | length 6.1
  Signal 1 w0.102: QSPI.3 19.27,14.5 21.5,14.5 22.25,15.25 R34.1
NetQSPI_5: QSPI.5 R32.1 | length 10.7
  Signal 1 w0.127: QSPI.5@11.498,15.838 11.498,16.498 12.5,17.5 19.25,17.5 19.748,17.998 R32.1 20,18.248 R32.1@20,18
  Signal 1 w0.3: QSPI.5 QSPI.5@11.498,15.838
NetQSPI_6: QSPI.6 R36.1 | length 1.5
  Signal 1 w0.102: R36.1 11.428,14.498 QSPI.6
NetQSPI_7: QSPI.7 R35.1 | length 8.2
  Signal 1 w0.102: R35.1 9.25,18 9,17.75 9,13.5 9.252,13.248 11.448,13.248 QSPI.7
NRST: IC1.7 J3.15 | length 33.6
  Signal 1 w0.127: v1(8.25,18.75) 17.75,18.75 18.5,19.5 18.5,21.561 IC1.7
  Signal 2 w0.127: J3.15 1.75,28.45 1.75,19 2.5,18.25 7.75,18.25 v1(8.25,18.75)
QSPI_CLK: IC1.17 R36.2 | length 19.2
  Signal 1 w0.102: R36.2 10.002,15.5 10.5,15.5 10.75,15.25 12.25,15.25 13.75,16.75 v1(17.5,16.75) ; v1(26.25,19.5) 26.653,19.903 26.653,20.043 IC1.17
  Signal 2 w0.102: v1(17.5,16.75) 23.5,16.75 v1(26.25,19.5)
QSPI_IO4: IC1.9 R32.2 | length 4.3
  Signal 1 w0.102: R32.2 20.25,19.75 20,20 20,21.646 IC1.9
QSPI_IO5: IC1.10 R33.2 | length 5.9
  Signal 1 w0.102: R33.2 21.25,19.75 20.5,20.5 20.5,21.439 IC1.10
QSPI_IO6: IC1.11 R34.2 | length 4
  Signal 1 w0.102: IC1.11@21.969,22.201 IC1.11 21.2,21.432 21.2,20.717 22.25,19.667 R34.2
QSPI_IO7: IC1.8 R35.2 | length 13
  Signal 1 w0.102: R35.2 12.5,18 12.75,18.25 18.25,18.25 19.25,19.25 19.25,21.604 IC1.8
QSPI_NCS: IC1.16 R37.2 | length 3.4
  Signal 1 w0.102: R37.2 23.25,19 23,19.25 23,19.697 IC1.16
SLAVE: IC1.42 R31.1 | length 14.5
  Signal 1 w0.127: IC1.42 30.75,33.811 30.75,43.5 31.401,44.151 32.036,44.151 R31.1
SPI1_CS: IC1.43 J4.8 P3.3 R2.1 | length 46.8
  Signal 1 w0.127: R2.1@9.3,43.4 25.4,43.4 26.25,44.25 26.25,46.774 J4.8 26.252,47.502 26.5,47.75 30,47.75 31.21,46.54 31.21,45.46 ; IC1.43 30,33.768 30,38.75 30,44.25 31.21,45.46 ; P3.3 31.21,45.46
SPI1_MISO: IC1.56 J4.5 | length 21.2
  Signal 1 w0.127: v1(19.75,32.5) 19.802,32.5 21.068,31.234 IC1.56 ; J4.5 27.752,45.911 28,45.662 v1(28,45.5)
  Signal 2 w0.127: v1(19.75,32.5) 22.25,32.5 26.698,36.948 26.698,44.198 v1(28,45.5)
SPI1_MOSI: IC1.23 J4.6 | length 41.6
  Signal 1 w0.127: J4.6 27.252,44.998 v1(28.5,43.75) ; IC1.23 29.189,21.75 30.75,21.75 v2(31.5,22.5)
  Signal 2 w0.127: v1(28.5,43.75) 31,43.75 32.5,42.25 32.5,31.75 35,29.25 37.75,29.25 38.75,28.25 38.75,24.75 38,24 36.75,24 36.25,23.5 34,23.5 33,22.5 v2(31.5,22.5)
SPI1_SCK: IC1.15 J4.7 | length 31.1
  Signal 1 w0.127: v1(20.25,27.25) 23.75,23.75 23.75,21.276 23.241,20.767 IC1.15 ; J4.7 26.752,44.748 27.484,44.016 27.484,43.016 v1(27.5,43)
  Signal 2 w0.127: v1(20.25,27.25) 20.25,29.75 27.5,37 v1(27.5,43)
SPI2_CS: IC1.33 P2.7 | length 54.9